# Altium PCB Main ESP32_IoT Gateaway.PcbDoc (part 1 of 4)
Units mm, origin at the board's own origin, x right, y up, seen from the top; angles counter-clockwise.
Board outline 125.73 x 73.66 mm, 4 copper layers (Top Layer, GND, Layer 2, Bottom Layer), stack 0.603 mm thick; 167 components, 121 nets, 681 pads, 324 vias.
Unrouted connection lines stored in the file: 132.
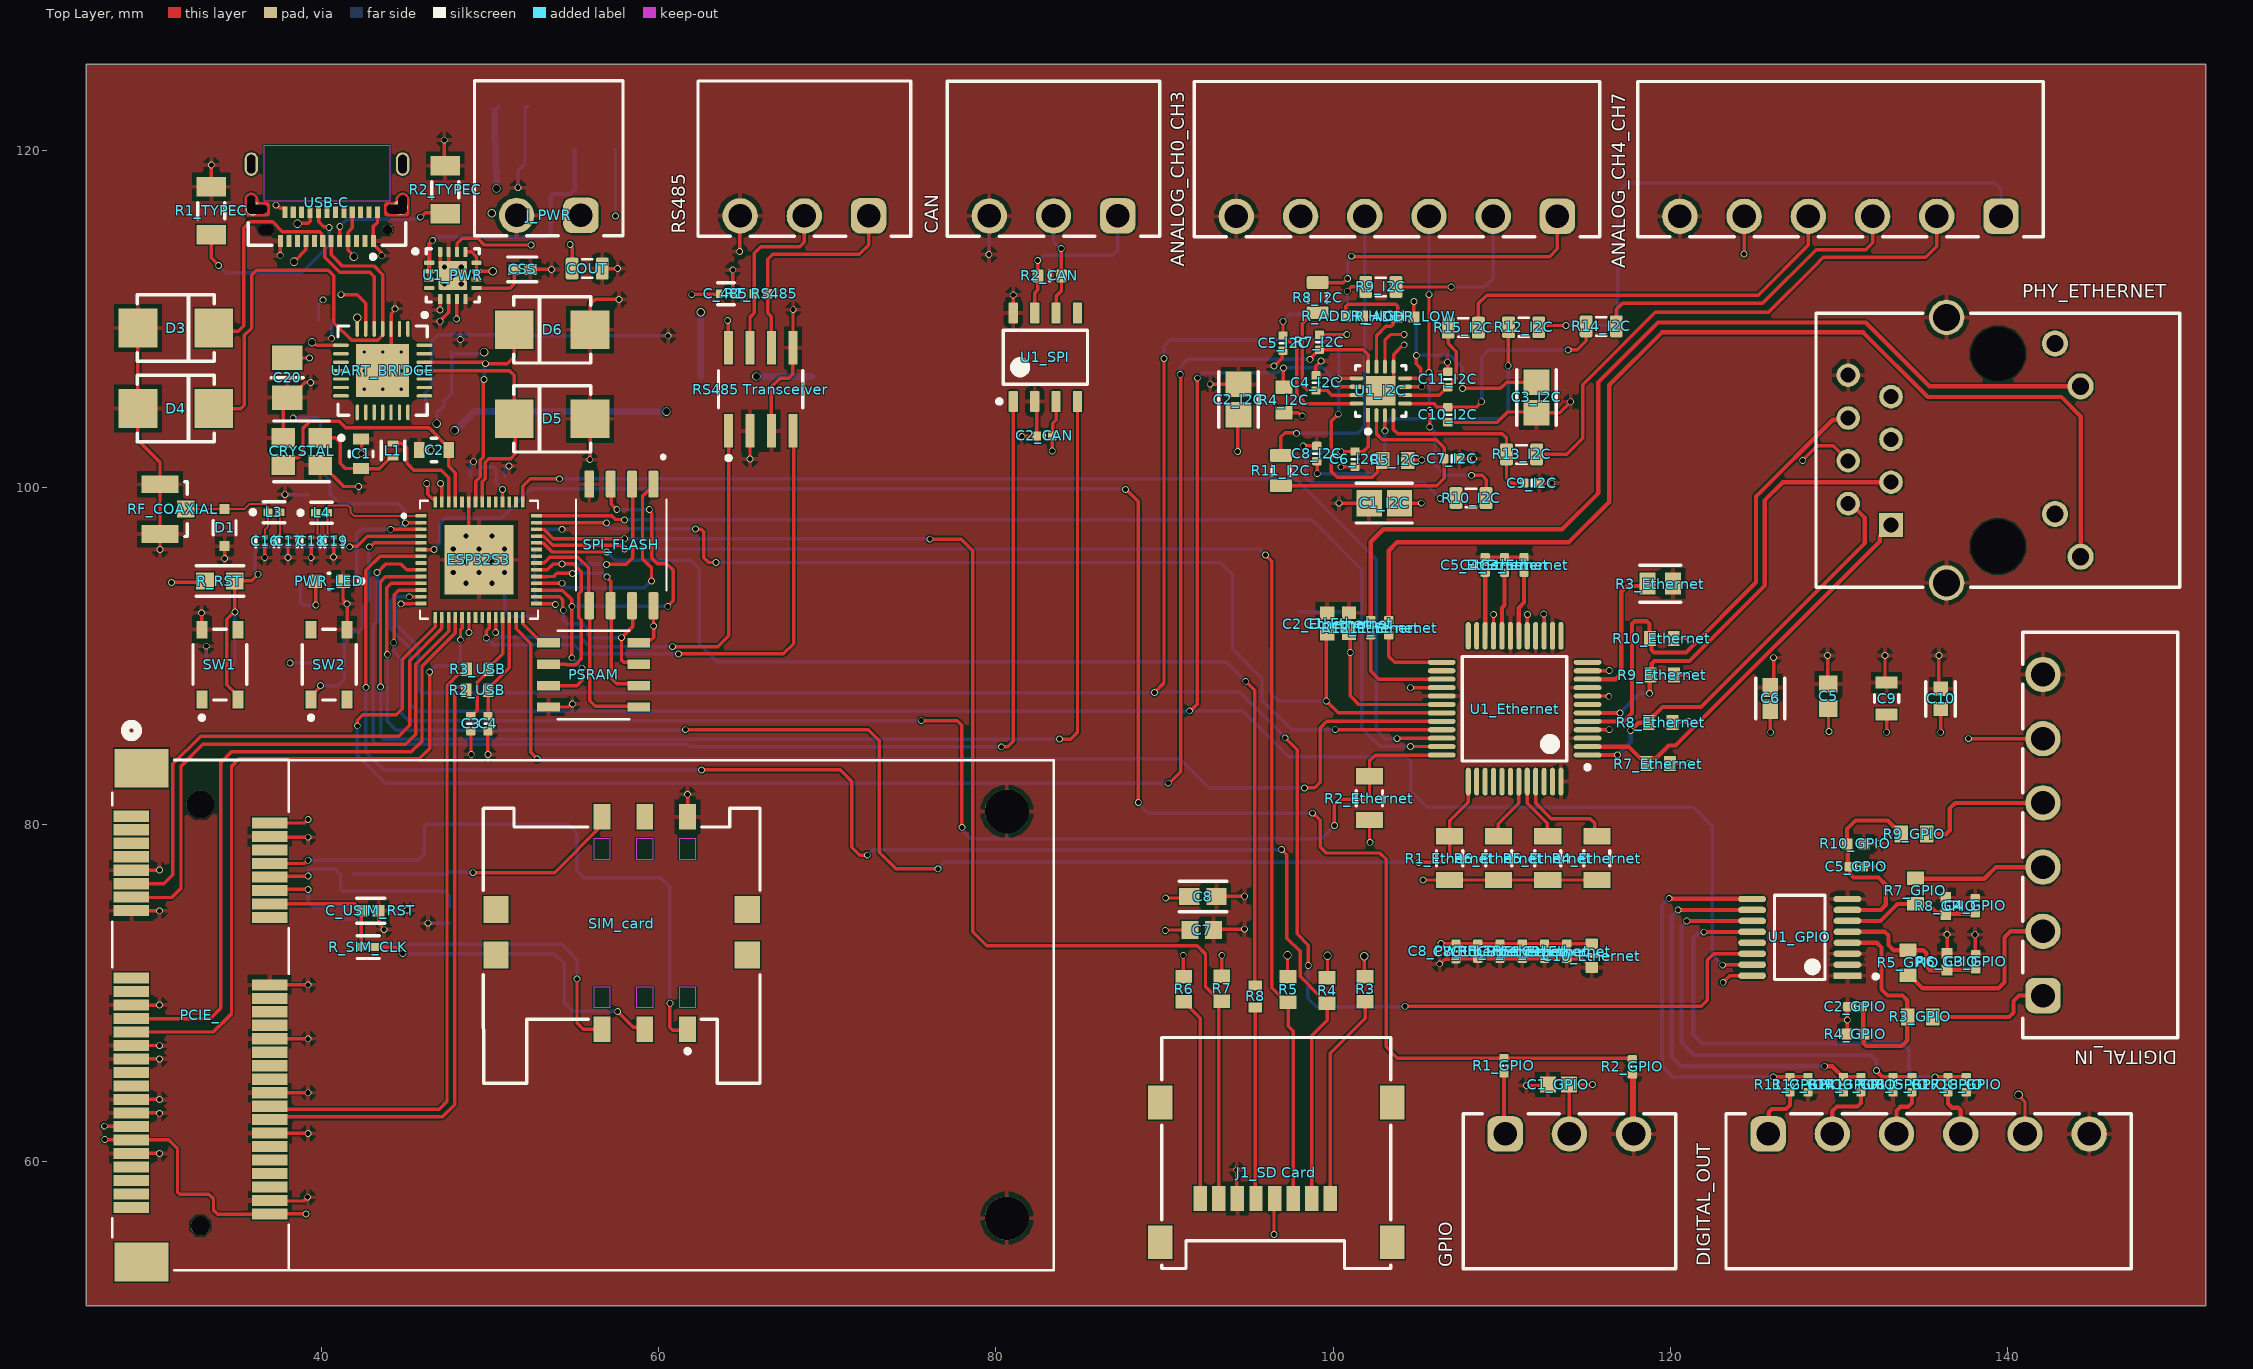
[diagram p0: Top Layer view]
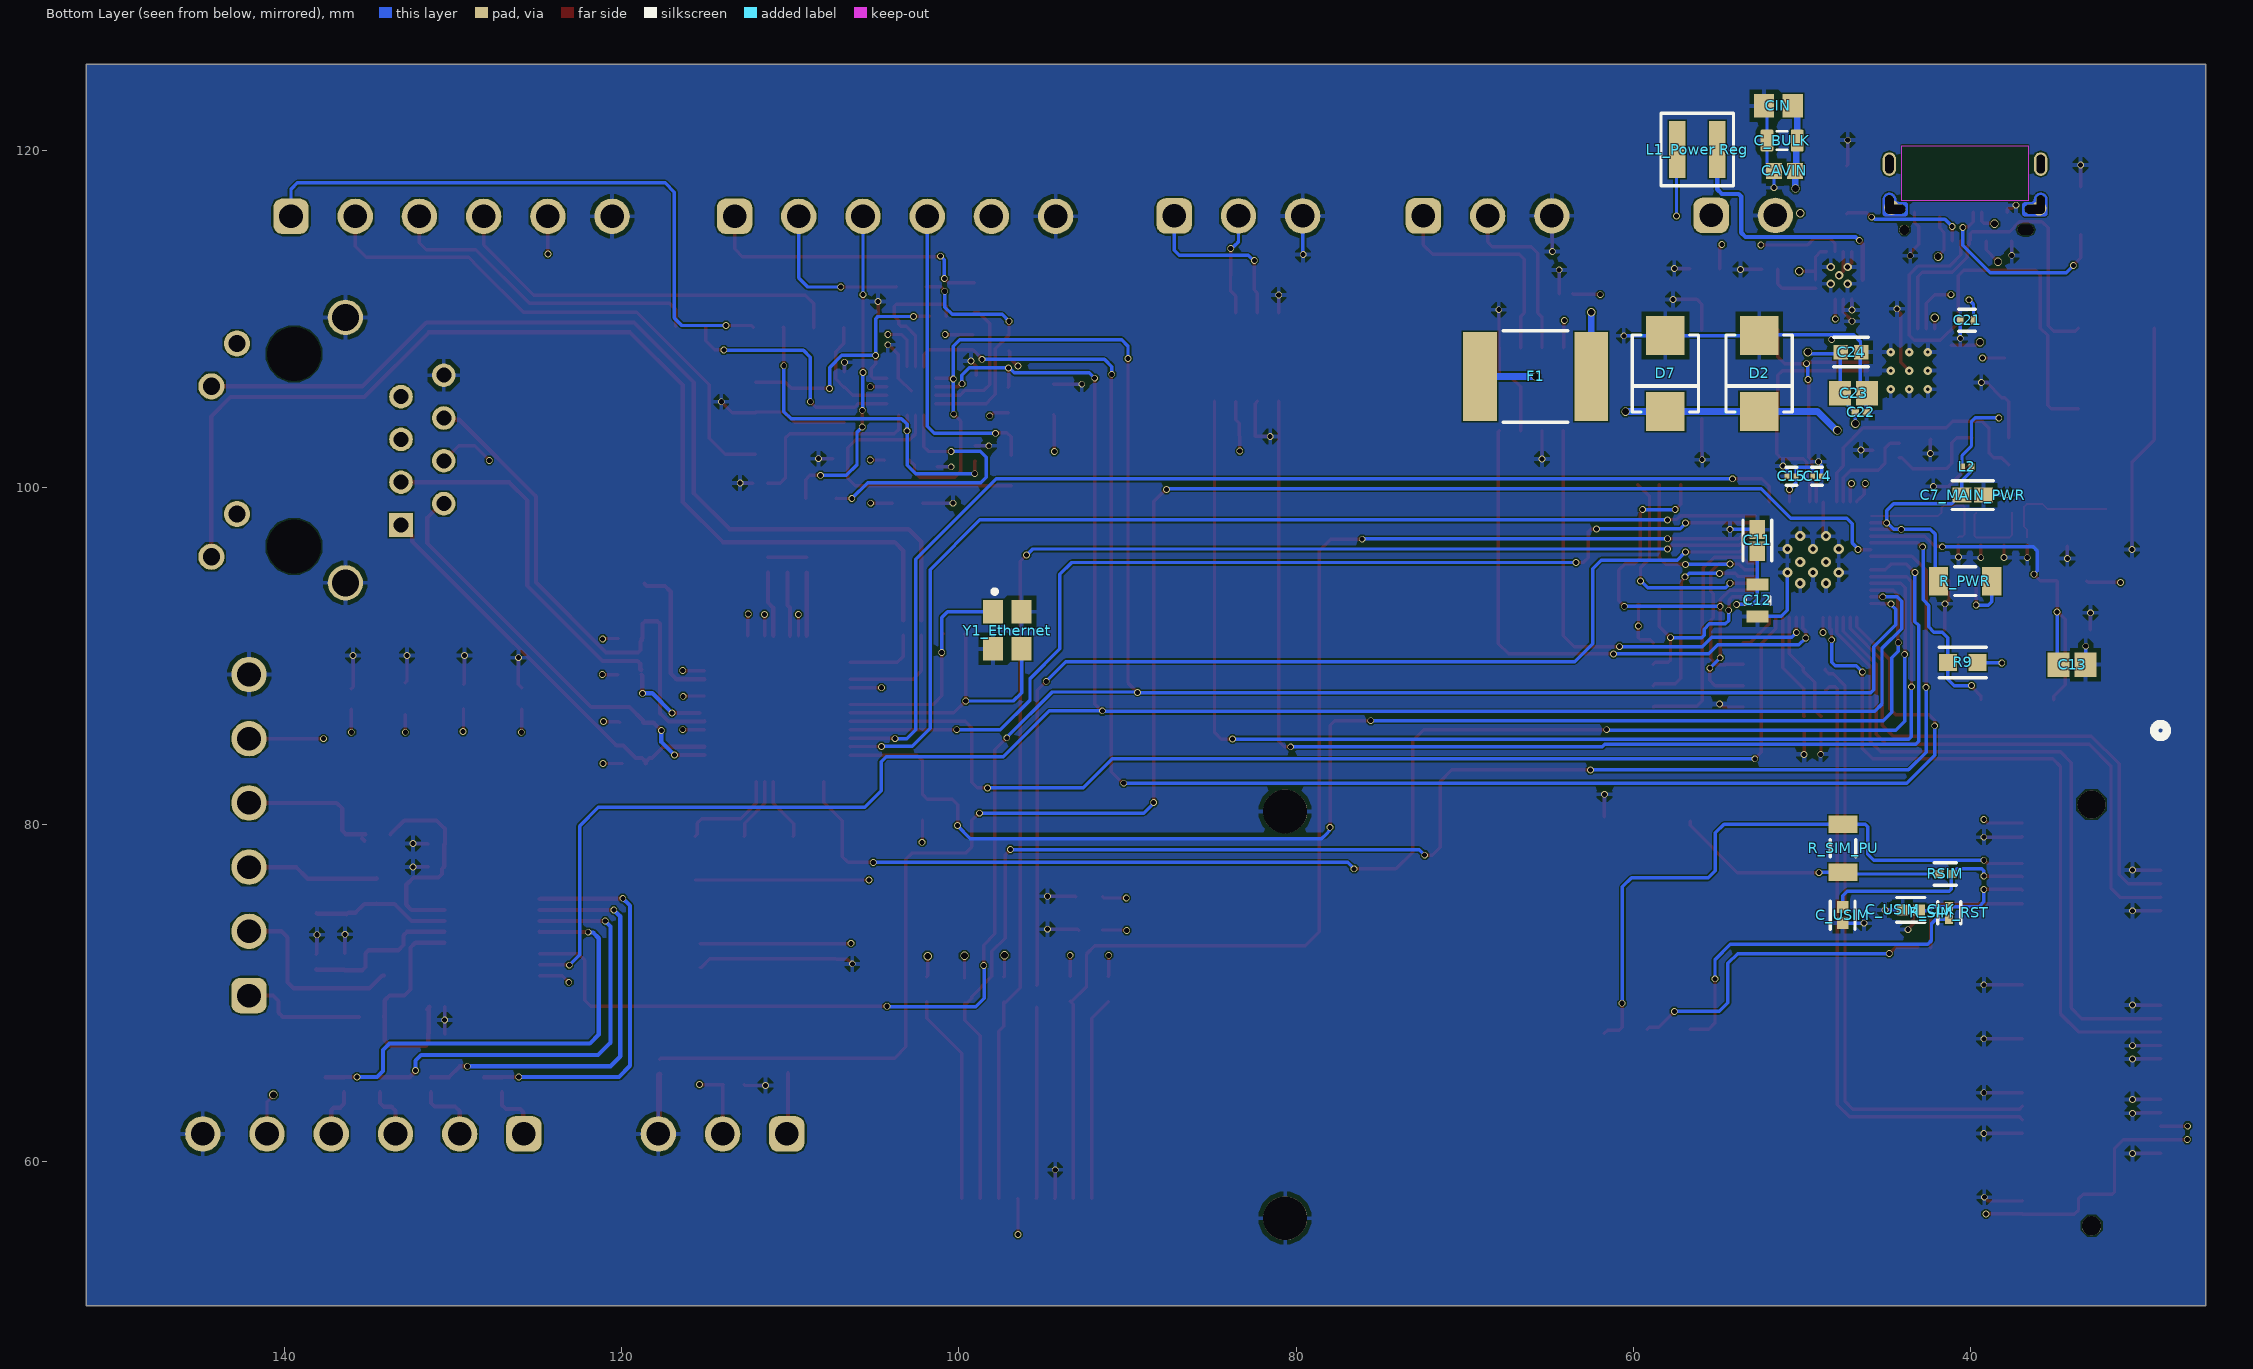
[diagram p1: Bottom Layer view, seen from below]
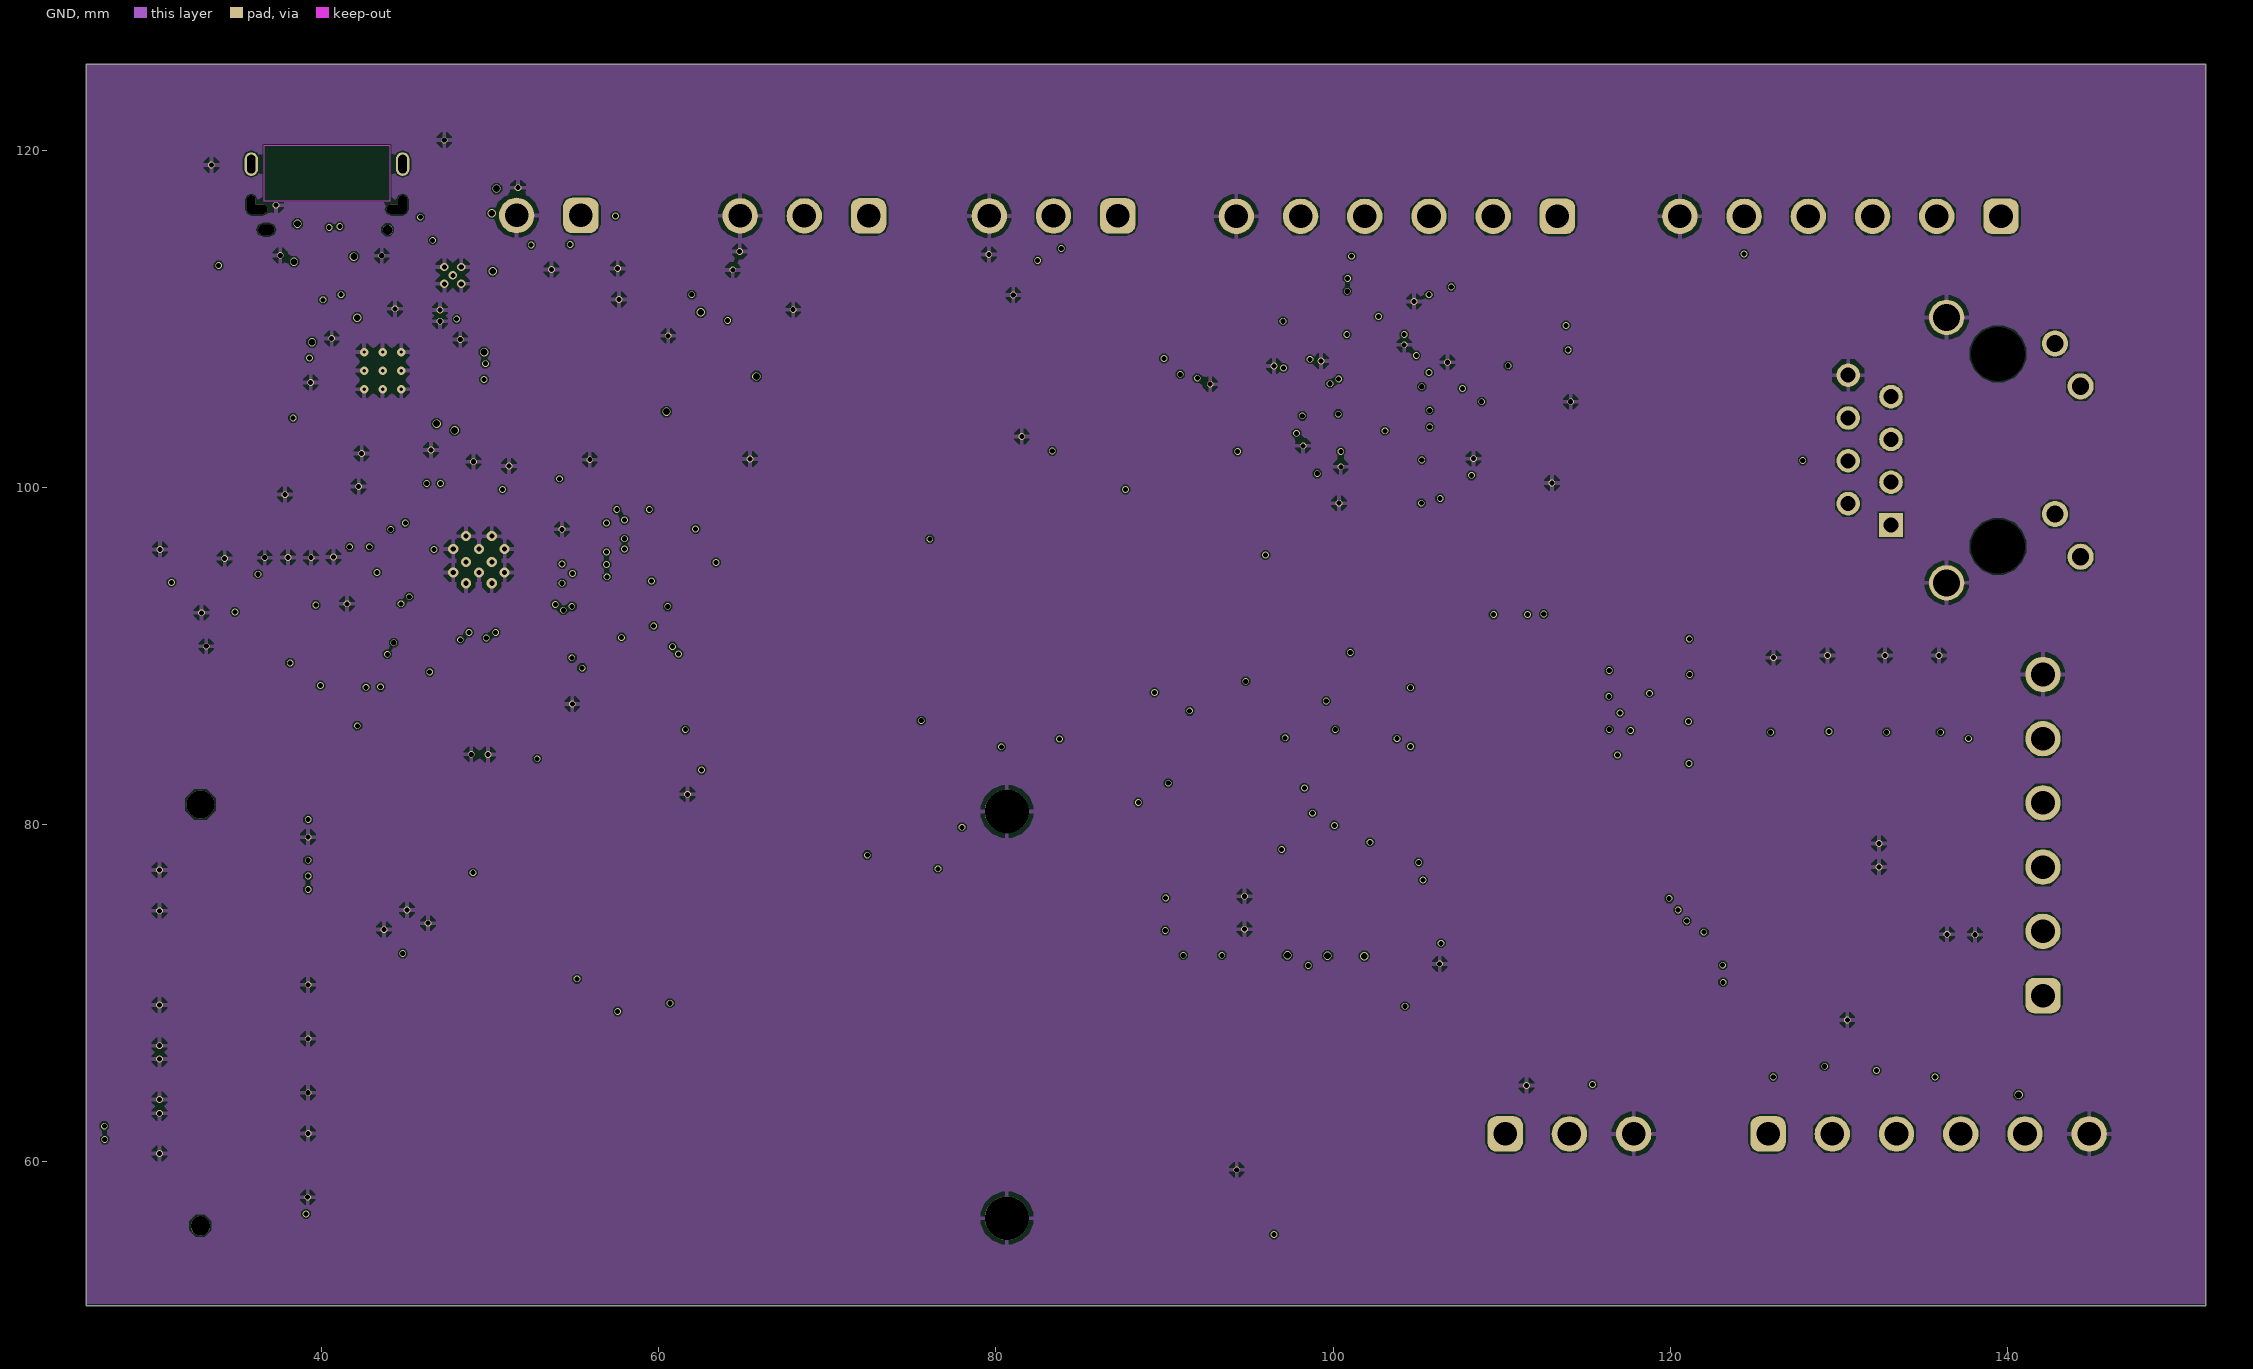
[diagram p2: GND]
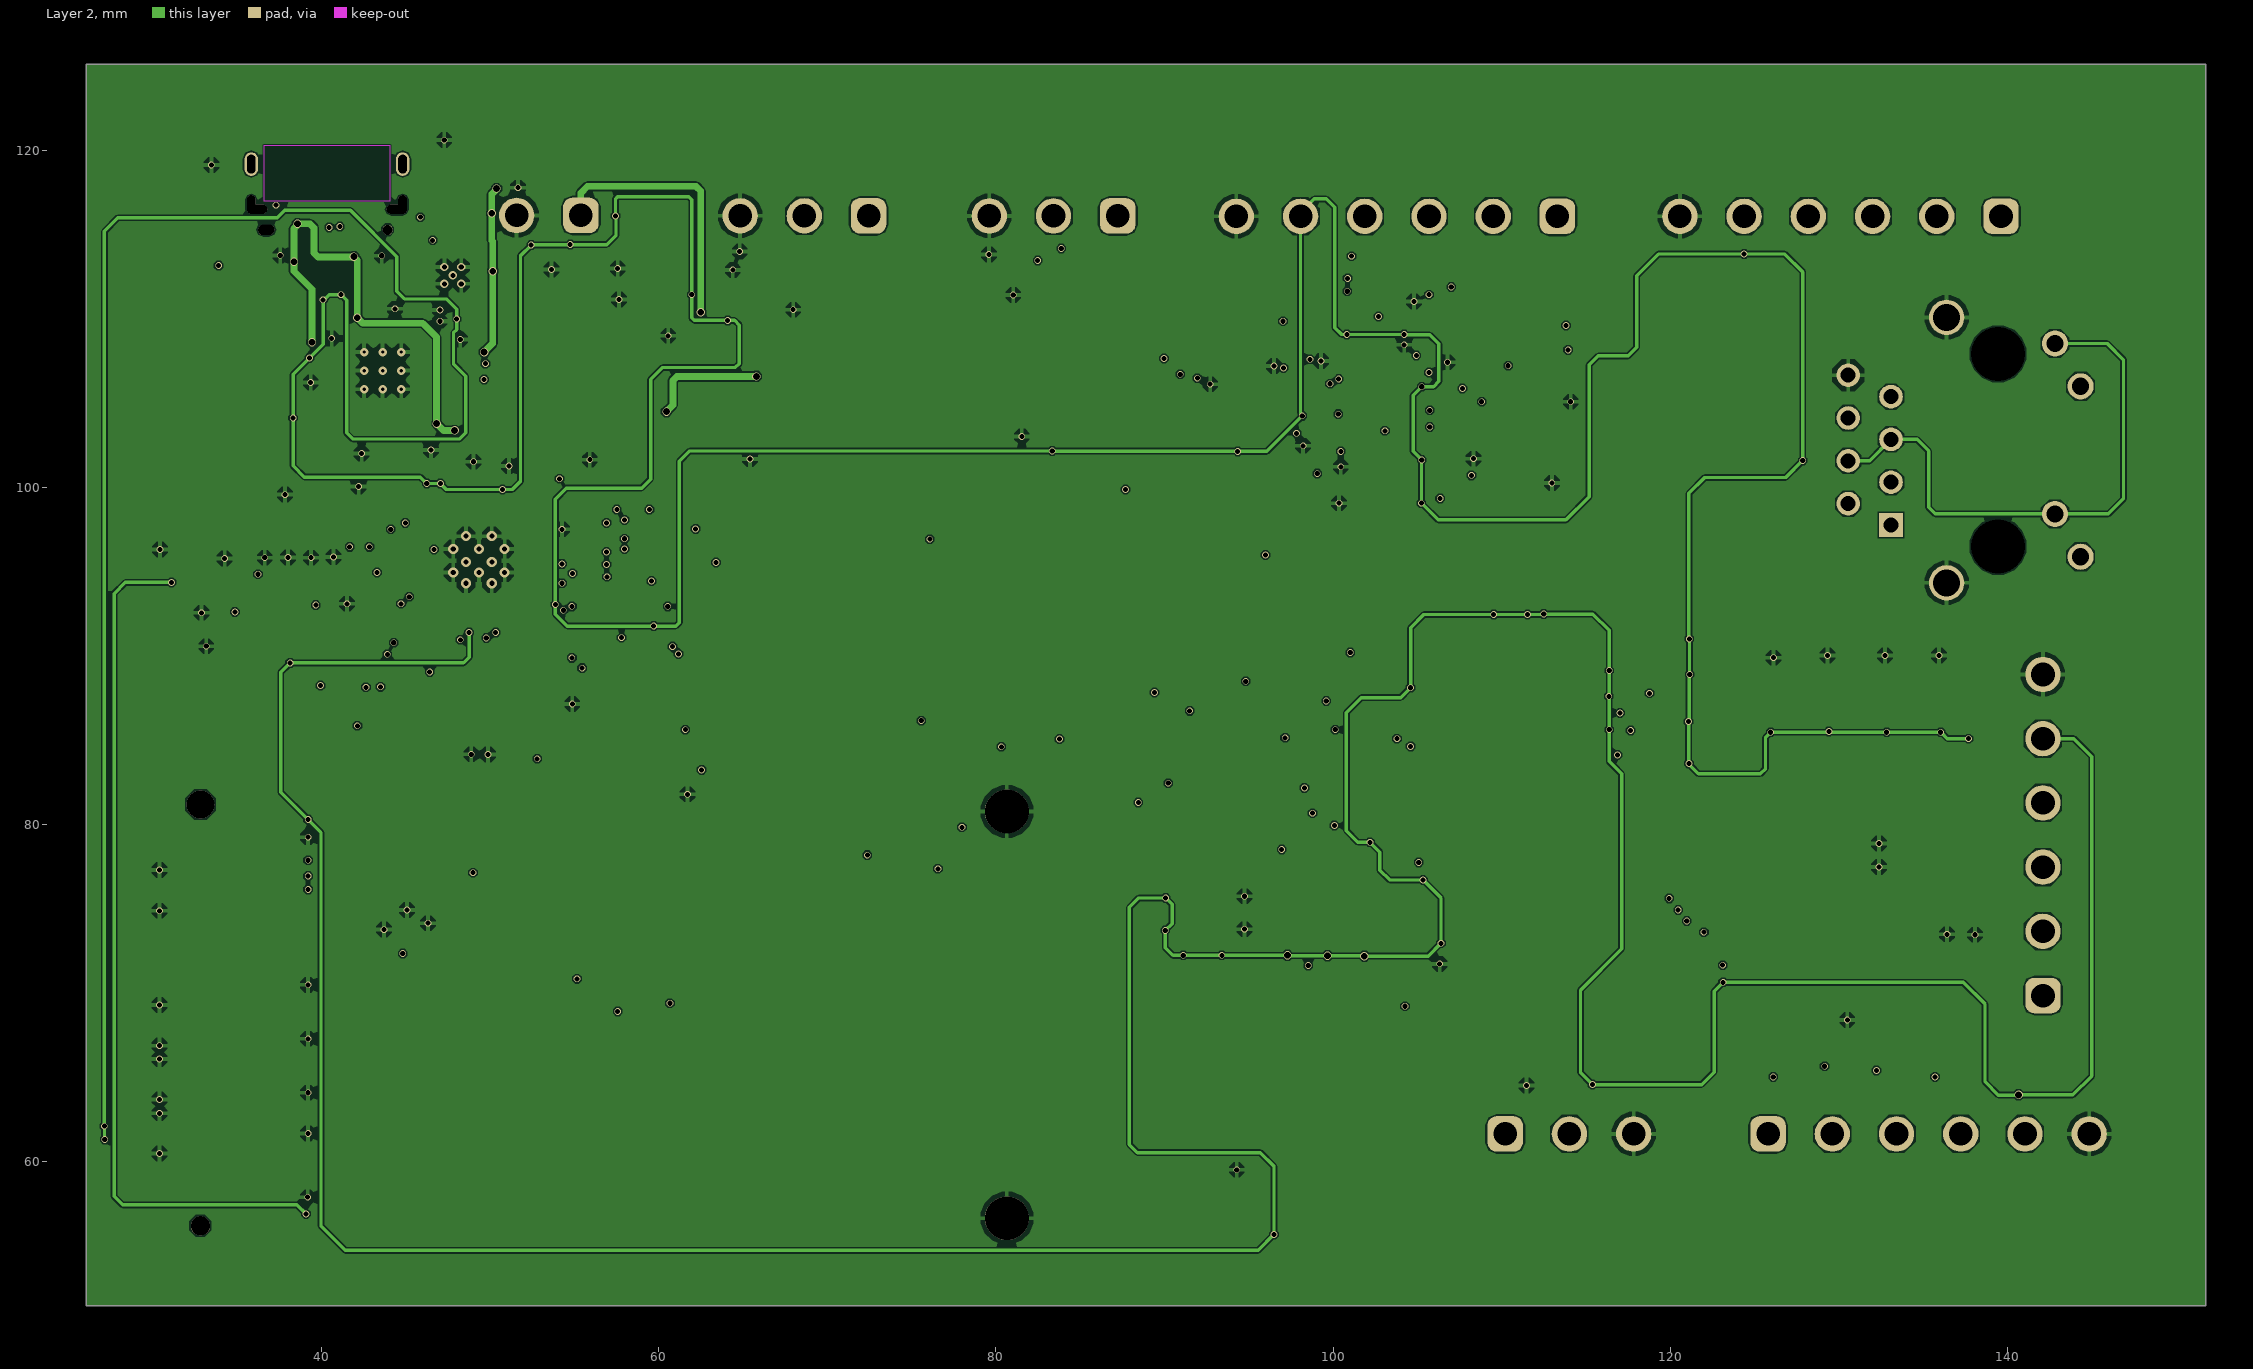
[diagram p3: Layer 2]
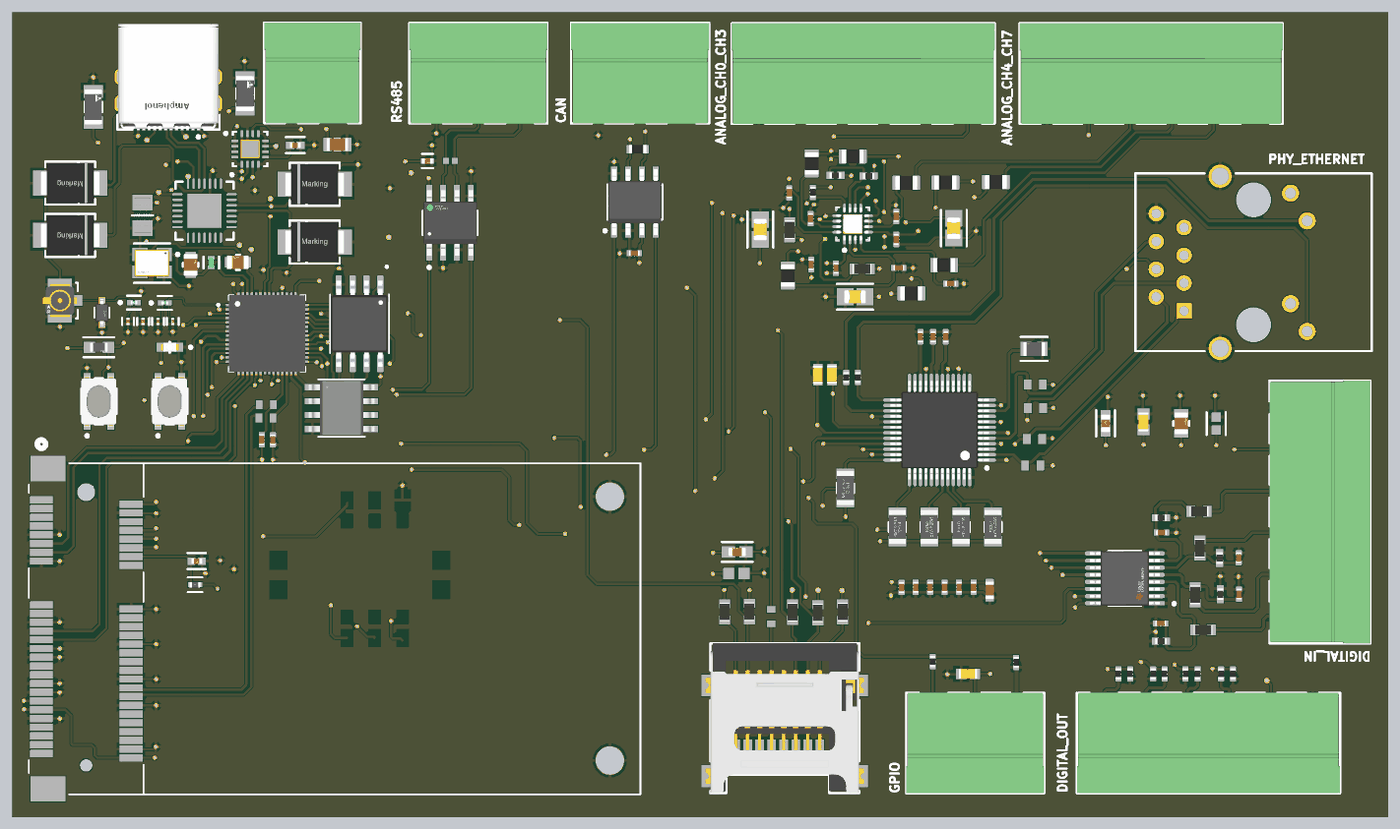
[diagram p6: 3D render of the assembled board from above, using the file's embedded part models]
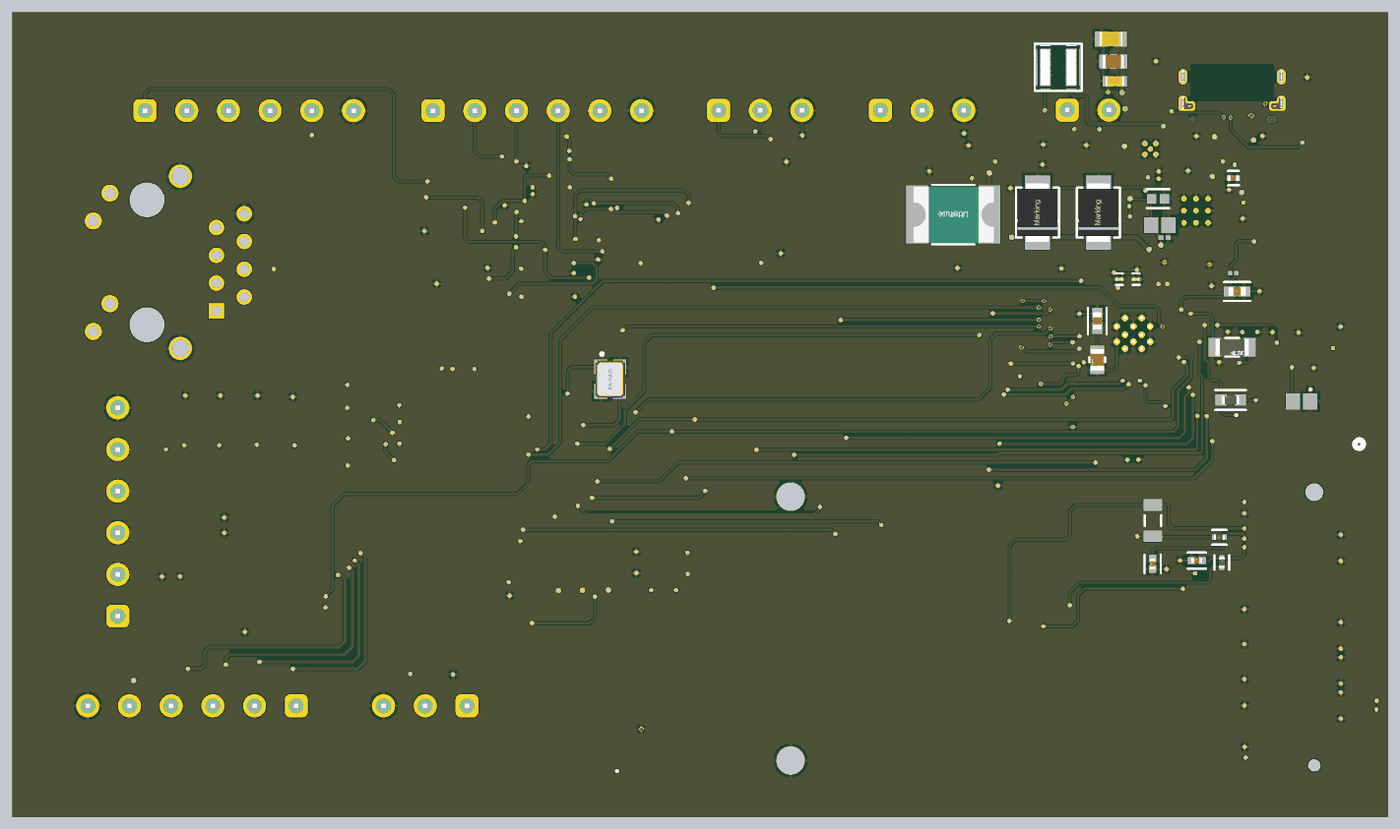
[diagram p7: 3D render of the assembled board from below, using the file's embedded part models]

## Layer stack, top to bottom
Top Solder: solder mask 0.0102, Solder Resist, Dk 3.5
Top Layer: signal copper 0.0356
Dielectric 2: prepreg 0.0711, PP-006, Dk 4.1
GND: signal copper 0.035
Dielectric 1: dielectric 0.32, FR-4, Dk 4.8
Layer 2: signal copper 0.035
Dielectric 3: prepreg 0.0711, PP-006, Dk 4.1
Bottom Layer: signal copper 0.0356
Bottom Solder: solder mask 0.0102, Solder Resist, Dk 3.5

## Board outline
26.035,51.435 26.035,125.095 151.765,125.095 151.765,51.435

## Design rules (kind name [scope] priority, off if disabled: settings)
Clearance [All] p1: gap=0.076 ignorepadtopadclearanceinfootprint=TRUE except(0: THPad-Hole; 0.051: SMDPad-SMDPad SMDPad-THPad THPad-THPad; 0.1: Arc-Arc Arc-Track Arc-SMDPad Arc-THPad Arc-Via Track-Track Track-SMDPad Track-THPad Track-Via SMDPad-Via THPad-Via Via-Via)
DiffPairsRouting DiffPairsRouting_1 [InDifferentialPair('TX')] p1: maxlimit=0.254 minlimit=0.254 mostfreqgap=0.254 toplayer_minwidth=0.254 toplayer_maxwidth=0.381 toplayer_prefwidth=0.254 midlayer1_minwidth=0.254 midlayer1_maxwidth=0.381 midlayer1_prefwidth=0.254 midlayer2_minwidth=0.254 midlayer2_maxwidth=0.381 midlayer2_prefwidth=0.254 bottomlayer_minwidth=0.254 bottomlayer_maxwidth=0.381 bottomlayer_prefwidth=0.254 maxuncoupledlength=12.7
DiffPairsRouting [InDifferentialPair('RX')] p2: maxlimit=0.254 minlimit=0.254 mostfreqgap=0.254 toplayer_minwidth=0.254 toplayer_maxwidth=0.381 toplayer_prefwidth=0.254 midlayer1_minwidth=0.254 midlayer1_maxwidth=0.381 midlayer1_prefwidth=0.254 midlayer2_minwidth=0.254 midlayer2_maxwidth=0.381 midlayer2_prefwidth=0.254 bottomlayer_minwidth=0.254 bottomlayer_maxwidth=0.381 bottomlayer_prefwidth=0.254 maxuncoupledlength=12.7
HoleSize [All] p1: absolutevalues=TRUE maxlimit=3.5 minlimit=0.025 maxpercent=80.000 minpercent=20.000
HoleToHoleClearance [All] p1: gap=0 allowstackedmicrovias=TRUE
MinimumSolderMaskSliver [All] p1: minsoldermaskwidth=0.01
PolygonConnect [All] p1: connectstyle=Relief reliefconductorwidth=0.254 reliefentries=4 polygonreliefangle="90 Angle" airgapwidth=0.254
RoutingVias [All] p1: holewidth=0.3 width=0.3 viastyle="Through Hole" minholewidth=0.2 minwidth=0.3 maxholewidth=0.4 maxwidth=0.4
SilkToSolderMaskClearance [IsPad] p1: minsilkscreentomaskgap=0.01 clearancetoexposedcopper=TRUE
SolderMaskExpansion [All] p1: expansion=0 istentingtop=FALSE
SupplyNets "Schematic Supply Nets_1" [InNet('GND')] p1: voltage=0.000
SupplyNets "Schematic Supply Nets_5" [InNet('3V3')] p2: voltage=0.000
SupplyNets "Schematic Supply Nets" [InNet('5V')] p3: voltage=0.000
Width RF [InNetClass('RF')] p1: maxlimit=0.116 minlimit=0.068 preferedwidth=0.116 toplayer_minwidth=0.116 midlayer1_maxwidth=0.068 midlayer1_prefwidth=0.068 midlayer2_maxwidth=0.068 midlayer2_prefwidth=0.068 bottomlayer_minwidth=0.116 impedanceprofiledriven=TRUE impedanceprofileid={CE16CFBE-E434-417E-8F0C-90AE14FFE117} impedanceprofilevalue=50.000000 minimp=50.000000 maximp=50.000000 favimp=50.000000
Width SIGNAL [InNetClass('SIGNAL')] p2: maxlimit=0.3 minlimit=0.2 preferedwidth=0.254
Width PWR [InNetClass('POWER')] p3: maxlimit=0.4 minlimit=0.2 preferedwidth=0.35 minimp=50.000000 maximp=50.000000 favimp=50.000000
25 further rules are at their usual default settings.

## Classes and differential pairs
net class RF: NetC16_1 NetC17_1 RF_LNA
component class "U_GPIO Direct": C1_GPIO C2_GPIO C3_GPIO C4_GPIO C5_GPIO DIGITAL_IN DIGITAL_OUT GPIO R1_GPIO R2_GPIO R3_GPIO R4_GPIO R5_GPIO R6_GPIO R7_GPIO R8_GPIO R9_GPIO R10_GPIO R11_GPIO R12_GPIO R13_GPIO R14_GPIO R15_GPIO R16_GPIO R17_GPIO R18_GPIO U1_GPIO
component class "U_Power Regulator": C_BULK CAVIN CIN COUT CSS F1 J_PWR "L1_Power Reg" U1_PWR
component class "U_Ethernet PHY": C1_Ethernet C2_Ethernet C3_Ethernet C4_Ethernet C5_Ethernet C6_Ethernet C7_Ethernet C8_Ethernet C9_Ethernet C10_Ethernet C11_Ethernet PHY_ETHERNET R1_Ethernet R2_Ethernet R3_Ethernet R4_Ethernet R5_Ethernet R6_Ethernet R7_Ethernet R8_Ethernet R9_Ethernet R10_Ethernet R11_Ethernet R12_Ethernet U1_Ethernet Y1_Ethernet
net class POWER: 3V3 5V GND NetC1_1 NetPWR_LED_2 NetR1_TYPEC_1 NetR2_TYPEC_1
net class SIGNAL: ADS_ALERT BOOT CD/DATA3 I2C_SCL I2C_SDA NetESP32S3_6 NetESP32S3_9 NetESP32S3_10 NetESP32S3_11 NetESP32S3_12 NetESP32S3_16 NetESP32S3_17 NetESP32S3_18 NetESP32S3_19 NetESP32S3_23 NetESP32S3_24 NetESP32S3_27 NetESP32S3_38 NetESP32S3_39 NetESP32S3_40 NetESP32S3_41 NetESP32S3_42 NetESP32S3_43 RXD0 SPICLK SPICS0 SPICS1 SPID SPIHD SPIQ SPIWP TXD0 XTAL_N XTAL_P
component class U_Minimum_system: C1 C2 C3 C4 C5 C6 C7_MAIN_PWR C8_PWRFLTR C9 C10 C11 C12 C13 C14 C15 C16 C17 C18 C19 C20 C21 C22 C23 C24 CRYSTAL D1 D2 D3 D4 D5 D6 D7 ESP32S3 L1 L2 L3 L4 PSRAM PWR_LED R1_TYPEC R2_TYPEC R2_USB R3_USB R9 R_PWR R_RST RF_COAXIAL SPI_FLASH SW1 SW2 UART_BRIDGE USB-C
component class "U_UART Bus": C_485 C_USIM C_USIM_CLK C_USIM_RST PCIE_ R1_RS485 R_SIM_CLK R_SIM_PU R_SIM_RST RS485 "RS485 Transceiver" RSIM SIM_card
component class "U_SPI Bus": C2_CAN CAN R2_CAN U1_SPI
component class "U_SD Card": C7 C8 "J1_SD Card" R3 R4 R5 R6 R7 R8
component class "U_I2C Bus": ANALOG_CH0_CH3 ANALOG_CH4_CH7 C1_I2C C2_I2C C3_I2C C4_I2C C5_I2C C6_I2C C7_I2C C8_I2C C9_I2C C10_I2C C11_I2C R4_I2C R5_I2C R7_I2C R8_I2C R9_I2C R10_I2C R11_I2C R12_I2C R13_I2C R14_I2C R15_I2C R_ADDR_HIGH R_ADDR_LOW U1_I2C
differential pair RX: +RX_P -RX_N
differential pair TX: +TX_P -TX_N
differential pair D: +D_P -D_N
differential pair USB: +USB_P -USB_N
differential pair DATA: +DATA_P -DATA_N

## Components (designator, comment, footprint, x,y, rotation, side; value= is the part's Value field where it differs from the comment)
ANALOG_CH0_CH3 "691322310006" 691322310006 103.784,119.478 r180 top (schematic designator J1_I2C)
ANALOG_CH4_CH7 "691322310006" 691322310006 130.099,119.478 r180 top (schematic designator J2_I2C)
C1 "28 pF" FP-GQM219-0_15-MFG 42.342,101.981 r90 top
C1_Ethernet "18 pF" CAPC1608X90X35LL10T15 100.94,91.938 r90 top
C1_GPIO "Capacitor 100 nF +/-10% 50 V 0603" CAPC1608X90X40NL10T20 113.36,64.567 r180 top value=100nF
C1_I2C "AC0805KKX7R5BB105" FP-AC0805-0_85-IPC_A 103.036,99.06 r180 top value=1µF
C2 "28 pF" FP-GQM219-0_15-MFG 46.66,102.21 r180 top
C2_CAN "Capacitor 100nF +/-20% 50V 0402" CAPC0402(1005)60_L 82.88,103.048 r0 top value=100nF
C2_Ethernet "18 pF" CAPC1608X90X35LL10T15 99.644,91.923 r270 top
C2_GPIO "Capacitor 10nF +/-20% 50V 0402" CAPC0402(1005)60_L 130.962,69.19 r180 top value=10nF
C2_I2C "AC0805KKX7R5BB105" FP-AC0805-0_85-IPC_A 94.386,105.207 r90 top value=1µF
C3 "Capacitor 100nF +/-20% 50V 0402" CAPC0402(1005)60_L 48.844,85.983 r270 top value=100nF
C3_Ethernet "Capacitor 100nF +/-20% 10V 0402" CAPC0402(1005)60_L 111.328,95.395 r90 top value=100nF
C3_GPIO "Capacitor 10nF +/-20% 50V 0402" CAPC0402(1005)60_L 138.125,71.857 r90 top value=10nF
C3_I2C "AC0805KKX7R5BB105" FP-AC0805-0_85-IPC_A 112.065,105.334 r270 top value=1µF
C4 "Capacitor 100nF +/-20% 50V 0402" CAPC0402(1005)60_L 49.86,85.972 r90 top value=100nF
C4_Ethernet "Capacitor 100nF +/-20% 10V 0402" CAPC0402(1005)60_L 110.174,95.395 r90 top value=100nF
C4_GPIO "Capacitor 10nF +/-20% 50V 0402" CAPC0402(1005)60_L 138.1,75.184 r90 top value=10nF
C4_I2C "Capacitor 10nF +/-20% 50V 0402" CAPC0402(1005)60_L 98.984,106.197 r90 top value=10nF
C5 "Capacitor 1uF +/- 10% 16V 0603" CAPC1608X90X35ML15T15 129.388,87.605 r270 top value=1µF
C5_Ethernet "Capacitor 100nF +/-20% 10V 0402" CAPC0402(1005)60_L 109.02,95.395 r270 top value=100nF
C5_GPIO "Capacitor 10nF +/-20% 50V 0402" CAPC0402(1005)60_L 131.039,77.495 r0 top value=10nF
C5_I2C "Capacitor 10nF +/-20% 50V 0402" CAPC0402(1005)60_L 97.028,108.56 r270 top value=10nF
C6 "0.1 uF" FP-C1608-080-0_1-IPC_B 125.933,87.478 r270 top
C6_Ethernet "Capacitor 100nF +/-20% 10V 0402" CAPC0402(1005)60_L 112.547,72.484 r90 top value=100nF
C6_I2C "Capacitor 10nF +/-20% 50V 0402" CAPC0402(1005)60_L 101.295,101.676 r270 top value=10nF
C7 "100 nF" MURA-0603_H_0.9_M 92.202,73.736 r0 top
C7_Ethernet "Capacitor 100nF +/-20% 10V 0402" CAPC0402(1005)60_L 111.227,72.484 r90 top value=100nF
C7_I2C "Capacitor 10nF +/-20% 50V 0402" CAPC0402(1005)60_L 107.036,101.702 r0 top value=10nF
C7_MAIN_PWR "0.1 uF" FP-C1608-080-0_1-IPC_B 39.853,99.543 r0 bottom
C8 "10 uF" FP-GRM188-0_1-e0_2_0_55-IPC_A 92.278,75.717 r180 top
C8_Ethernet "Capacitor 100nF +/-20% 10V 0402" CAPC0402(1005)60_L 108.586,72.484 r90 top value=100nF
C8_I2C "Capacitor 10nF +/-20% 50V 0402" CAPC0402(1005)60_L 99.035,102.006 r90 top value=10nF
C8_PWRFLTR "Capacitor 10nF +/-20% 50V 0402" CAPC0402(1005)60_L 107.29,72.466 r90 top value=10nF
C9 "1 uF" FP-GRM21B-0_2-e0_2_0_7-MFG 132.842,87.467 r90 top
C9_Ethernet "Capacitor 100nF +/-20% 10V 0402" CAPC0402(1005)60_L 113.867,72.484 r90 top value=100nF
C9_I2C "Capacitor 10nF +/-20% 50V 0402" CAPC0402(1005)60_L 111.785,100.254 r0 top value=10nF
C10 "10 uF" FP-GRM188-0_15-IPC_C 136.042,87.452 r90 top
C10_Ethernet "Capacitor 10µF +/-20% 10V 0603" CAPC0603(1608)100_L 115.341,72.216 r90 top value=10µF
C10_I2C "Capacitor 10nF +/-20% 50V 0402" CAPC0402(1005)60_L 106.807,104.3 r270 top value=10nF
C11 "0.1 uF" FP-C1608-080-0_1-IPC_B 52.629,96.85 r90 bottom
C11_Ethernet "Capacitor 100nF +/-20% 10V 0402" CAPC0402(1005)60_L 109.906,72.484 r90 top value=100nF
C11_I2C "Capacitor 10nF +/-20% 50V 0402" CAPC0402(1005)60_L 106.807,106.401 r90 top value=10nF
C12 "1 uF" FP-GRM21B-0_2-e0_2_0_7-MFG 52.629,93.294 r270 bottom
C13 "1 uF" CAPC2013X140X50NL20T25 33.96,89.484 r180 bottom
C14 "0.1 uF" FP-CC0201-BA-MFG 49.084,100.66 r180 bottom value="100 nF"
C15 "0.1 uF" FP-CC0201-BA-MFG 50.608,100.66 r0 bottom value="100 nF"
C16 "1.5 pF" FP-GRM033-0_03-MFG 36.627,96.799 r270 top
C17 "1.5 pF" FP-GRM033-0_03-MFG 37.998,96.799 r270 top
C18 "1.5 pF" FP-GRM033-0_03-MFG 39.37,96.799 r270 top
C19 "1.5 pF" FP-GRM033-0_03-MFG 40.716,96.799 r270 top
C20 "4.7 uF" FP-GCJ31C-0_3-IPC_C 37.948,106.502 r270 top
C21 "100 nF" FP-GRM155-0_05-MFG 40.191,109.912 r0 bottom
C22 "100 nF" CAPC0603X33X15NL03T05 46.49,104.451 r0 bottom
C23 "1 uF" CAPC2013X140X50NL20T25 46.922,105.594 r180 bottom
C24 "10 uF" FP-GRM188-0_15-IPC_C 47.075,108.026 r180 bottom
C_485 "0.1 uF" FP-GRM155-0_05-MFG 63.983,111.481 r0 top
C_BULK "Capacitor 47µF +/-40% 6.3V 0805" CAPC0805(2012)145_L 51.167,120.574 r0 bottom value=47µF
C_USIM "33 pF" FP-GCM155-0_05-IPC_A 47.574,74.625 r270 bottom
C_USIM_CLK "33 pF" FP-GCM155-0_05-IPC_A 43.532,74.93 r0 bottom
C_USIM_RST "33 pF" FP-GCM155-0_05-IPC_A 42.901,74.879 r0 top
CAN "691322310003" 691322310003 83.414,119.503 r180 top (schematic designator P1_SPI)
CAVIN "Capacitor 100 nF +/-10% 50 V 0603" CAPC1608X90X40NL10T20 51.019,118.77 r0 bottom value=100nF
CIN "Capacitor 10 uF +/- 10% 16 V 0805" CAPC2013X135X45NL10T25 51.384,122.631 r0 bottom value=10µF
COUT "Capacitor 22µF +/-40% 16V 0805" CAPC0805(2012)145_L 55.753,112.979 r0 top value=22µF
CRYSTAL "40 MHz Crystal" FP-ABM8AIG-MFG 38.811,102.133 r180 top
CSS "GCG155R71H332KA01D" FP-GCG155-0_1-IPC_A 51.899,112.928 r0 top value=3.3nF
D1 "SOD323" FP-SOD323-CA-MFG 34.239,97.612 r270 top
D2 "824520581" WE-TVSP_DO-214AA_Unidirectional 52.523,106.756 r90 bottom
D3 "824520581" WE-TVSP_DO-214AA_Unidirectional 31.344,109.449 r180 top
D4 "824520581" WE-TVSP_DO-214AA_Unidirectional 31.344,104.673 r180 top
D5 "824520581" WE-TVSP_DO-214AA_Unidirectional 53.67,104.064 r0 top
D6 "824520581" WE-TVSP_DO-214AA_Unidirectional 53.67,109.347 r0 top
D7 "824520581" WE-TVSP_DO-214AA_Unidirectional 58.09,106.756 r90 bottom
DIGITAL_IN "691322310006" 691322310006 145.513,79.375 r90 top (schematic designator J2_GPIO)
DIGITAL_OUT "691322310006" 691322310006 135.331,58.242 r0 top (schematic designator J3_GPIO)
ESP32S3 "ESP32-S3" IC_ESP32-S3 49.327,95.707 r0 top
F1 "2920L300/15DR" FP-2920L-MFG 65.786,106.578 r0 bottom value=15mΩ
GPIO "691322310003" 691322310003 114.021,58.242 r0 top (schematic designator J1_GPIO)
"J1_SD Card" "693072010801" 693072010801 96.626,60.51 r0 top
J_PWR "691322310002" 691322310002 53.467,119.532 r180 top
L1 "24 nH" FP-LQW15AN_00-W0_5-0_1-MFG 44.221,102.184 r90 top
"L1_Power Reg" "XFL4020-222MEB" FP-XFL4020-MFG 56.194,120.04 r0 bottom value=2.2µH
L2 "ATFC-0201HQ-2N0B-T" INDC0603X28N 40.208,101.219 r180 bottom value=2nH
L3 "LQP03TN2N7B02D" FP-LQP03TG_02-IPC_A 37.164,98.524 r0 top
L4 "LQP03TN2N7B02D" FP-LQP03TG_02-IPC_A 39.989,98.491 r0 top
PCIE_ "679105700" CONN_679105700_MOL 32.801,68.686 r270 top
PHY_ETHERNET "J0011D21BNL" PULS-J00XXD21XNL-B-12 139.448,102.209 r270 top (schematic designator J1_Ethernet)
PSRAM "APS1604M-3SQR-SN" SOP8L_APS1604M-3SQR-SN_APY 56.134,88.875 r0 top
PWR_LED "APTD1608ZGC" FP-APTD1608ZGC-MFG 40.437,94.437 r180 top
R1_Ethernet "CRGCQ1206F10K" FP-CRGCQ1206-IPC_C 106.909,78.003 r270 top value=10k
R1_GPIO "Resistor 330R +/-5 % 0402 63 mW" RESC0402(1005)_L 110.134,65.684 r270 top value=330
R1_RS485 "120R 5% 0201(0603)" RESC0201(0603)_M 66.065,111.481 r180 top value="120.00 Ohm"
R1_TYPEC "5K1 ohm" FP-CRCW1206-e3-IPC_B 33.452,116.408 r90 top
R2_CAN "Resistor 120R +/-5 % 0603 0.1 W" RESC0603(1608)_L 83.185,112.547 r180 top value=120
R2_Ethernet "CRGCQ1206F10K" FP-CRGCQ1206-IPC_C 102.159,81.559 r270 top value=10k
R2_GPIO "Resistor 10K  +/-1 % 0402 63 mW" RESC0402(1005)_L 117.754,65.615 r270 top value=10k
R2_TYPEC "5K1 ohm" FP-CRCW1206-e3-IPC_B 47.32,117.653 r90 top
R2_USB "22 ohm" RESC1608X55X25LL10T15 49.225,87.96 r0 top
R3 "Resistor 10k +/-1% 0603 100 mW" RESC1608X55X25ML10T15 101.898,70.22 r270 top value=10k
R3_Ethernet "12.4kΩ" FP-TFCR0805-IPC_C 119.405,94.285 r0 top
R3_GPIO "Resistor 1k +/-1% 0603 100 mW" RESC1608X55X25ML10T15 134.837,68.58 r180 top value=1k
R3_USB "22 ohm" RESC1608X55X25LL10T15 49.251,89.205 r0 top
R4 "Resistor 10k +/-1% 0603 100 mW" RESC1608X55X25ML10T15 99.644,70.143 r90 top value=10k
R4_Ethernet "CRGCQ1206F10K" FP-CRGCQ1206-IPC_C 115.646,78.003 r90 top value=10k
R4_GPIO "Resistor 10k +/-1% 0402 63 mW" RESC1005X40X25ML05T05 130.988,67.564 r180 top value=10k
R4_I2C "Resistor 4k7 +/-1% 0603 100 mW" RESC1608X55X25ML10T15 97.079,105.181 r90 top value=4.7k
R5 "Resistor 10k +/-1% 0603 100 mW" RESC1608X55X25ML10T15 97.333,70.206 r90 top value=10k
R5_Ethernet "CRGCQ1206F10K" FP-CRGCQ1206-IPC_C 112.734,78.003 r90 top value=10k
R5_GPIO "Resistor 1k +/-1% 0603 100 mW" RESC1608X55X25ML10T15 134.112,71.792 r90 top value=1k
R5_I2C "Resistor 4k7 +/-1% 0603 100 mW" RESC1608X55X25ML10T15 103.683,101.6 r180 top value=4.7k
R6 "Resistor 10k +/-1% 0603 100 mW" RESC1608X55X25ML10T15 91.142,70.228 r270 top value=10k
R6_Ethernet "CRGCQ1206F10K" FP-CRGCQ1206-IPC_C 109.821,78.003 r90 top value=10k
R6_GPIO "Resistor 10k +/-1% 0402 63 mW" RESC1005X40X25ML05T05 136.423,71.857 r90 top value=10k
R7 "Resistor 10k +/-1% 0603 100 mW" RESC1608X55X25ML10T15 93.396,70.256 r270 top value=10k
R7_Ethernet "49.9 Ω" RESC1608X55X25NL10T15 119.278,83.617 r0 top
R7_GPIO "Resistor 1k +/-1% 0603 100 mW" RESC1608X55X25ML10T15 134.543,76.06 r270 top value=1k
R7_I2C "Resistor 10K  +/-1 % 0402 63 mW" RESC0402(1005)_L 99.187,108.61 r270 top value=10k
R8 "33 Ω" RESC1608X55X25LL10T15 95.377,69.799 r270 top
R8_Ethernet "49.9 Ω" RESC1608X55X25NL10T15 119.431,86.055 r180 top
R8_GPIO "Resistor 10k +/-1% 0402 63 mW" RESC1005X40X25ML05T05 136.347,75.159 r90 top value=10k
R8_I2C "Resistor 1K +/-5% 0805 125 mW" RESC0805(2012)_L 99.085,111.252 r270 top value=1k
R9 "10K" FP-AC0603-IPC_A 40.449,89.611 r0 bottom
R9_Ethernet "49.9 Ω" RESC1608X55X25NL10T15 119.532,88.875 r180 top
R9_GPIO "Resistor 1k +/-1% 0603 100 mW" RESC1608X55X25ML10T15 134.468,79.426 r180 top value=1k
R9_I2C "Resistor 1K +/-5% 0805 125 mW" RESC0805(2012)_L 102.826,111.89 r180 top value=1k
R10_Ethernet "49.9 Ω" RESC1608X55X25NL10T15 119.507,91.034 r0 top
R10_GPIO "Resistor 10k +/-1% 0402 63 mW" RESC1005X40X25ML05T05 130.988,78.842 r0 top value=10k
R10_I2C "Resistor 1K +/-5% 0805 125 mW" RESC0805(2012)_L 108.179,99.365 r180 top value=1k
R11_Ethernet "Resistor 330R +/-5 % 0402 63 mW" RESC0402(1005)_L 103.302,91.669 r270 top value=330
R11_GPIO "Resistor 330R +/-5 % 0402 63 mW" RESC0402(1005)_L 127.102,64.56 r270 top value=330
R11_I2C "Resistor 1K +/-5% 0805 125 mW" RESC0805(2012)_L 96.901,100.99 r270 top value=1k
R12_Ethernet "Resistor 330R +/-5 % 0402 63 mW" RESC0402(1005)_L 102.235,91.669 r270 top value=330
R12_GPIO "Resistor 10K  +/-1 % 0402 63 mW" RESC0402(1005)_L 128.168,64.56 r270 top value=10k
R12_I2C "Resistor 1K +/-5% 0805 125 mW" RESC0805(2012)_L 111.303,109.499 r180 top value=1k
R13_GPIO "Resistor 330R +/-5 % 0402 63 mW" RESC0402(1005)_L 131.318,64.56 r270 top value=330
R13_I2C "Resistor 1K +/-5% 0805 125 mW" RESC0805(2012)_L 111.176,101.956 r180 top value=1k
R14_GPIO "Resistor 10K  +/-1 % 0402 63 mW" RESC0402(1005)_L 130.277,64.56 r270 top value=10k
R14_I2C "Resistor 1K +/-5% 0805 125 mW" RESC0805(2012)_L 115.9,109.55 r180 top value=1k
R15_GPIO "Resistor 330R +/-5 % 0402 63 mW" RESC0402(1005)_L 134.341,64.56 r270 top value=330
R15_I2C "Resistor 1K +/-5% 0805 125 mW" RESC0805(2012)_L 107.721,109.474 r180 top value=1k
R16_GPIO "Resistor 10K  +/-1 % 0402 63 mW" RESC0402(1005)_L 133.223,64.56 r270 top value=10k
R17_GPIO "Resistor 330R +/-5 % 0402 63 mW" RESC0402(1005)_L 136.477,64.56 r270 top value=330
R18_GPIO "Resistor 10K  +/-1 % 0402 63 mW" RESC0402(1005)_L 137.566,64.56 r270 top value=10k
R_ADDR_HIGH "Resistor 0R +/- 5% 0402 100 mW" RESC1005X40X25ML05T05 101.252,110.16 r0 top value=DNP
R_ADDR_LOW "Resistor 0R +/- 5% 0402 100 mW" RESC1005X40X25ML05T05 104.292,110.109 r180 top value=DNP
R_PWR "1K" FP-RP732B-MFG 40.31,94.437 r180 bottom value=1.0KΩ
R_RST "10K" FP-AC0603-IPC_A 33.96,94.437 r0 top
R_SIM_CLK "0" FP-CRG0402-IPC_C 42.748,72.72 r0 top
R_SIM_PU "15k" RESC3116X65X40NL10T20 47.549,78.585 r90 bottom
R_SIM_RST "0" FP-CRG0402-IPC_C 41.25,74.752 r270 bottom
RF_COAXIAL "2337019-1" FP-2337019-1-MFG 30.404,98.706 r90 top
RS485 "691322310003" 691322310003 68.631,119.507 r180 top (schematic designator RS485_CNCTR)
"RS485 Transceiver" "MAX3485EESA+" FP-S8-5-MFG 66.04,105.816 r90 top
RSIM "0k" FP-CRG0402-IPC_C 41.478,77.064 r180 bottom
SIM_card "693010020611" 693010020611 -1212.197,-1197.199 r180 top (schematic designator SIM_CARD)
SPI_FLASH "W25Q64JVSSIQ_FLASH_SPI" SOIC127P790X216-8N 57.772,96.584 r270 top
SW1 "PTS810SJM250SMTRLFS" FP-PTS810SJM250SMTRLFS-MFG 33.96,89.484 r90 top
SW2 "PTS810SJM250SMTRLFS" FP-PTS810SJM250SMTRLFS-MFG 40.437,89.484 r90 top
U1_Ethernet "W5500" WIZ-W5500-LQFP-48_M 110.769,86.868 r180 top
U1_GPIO "TCA9534PWR" FP-PW0016A-IPC_B 127.686,73.304 r180 top
U1_I2C "ADS7128IRTER" FP-RTE0016C-IPC_B 102.826,105.719 r90 top
U1_PWR "TPS62132RGTR" RGT0016C_V 47.777,112.573 r0 top
U1_SPI "SN65HVD230MDREP" D0008A_L 82.931,107.721 r90 top
UART_BRIDGE "CP2102-GMR" SLAB-QFN-28-3125x3125TP_M 43.612,106.926 r270 top
USB-C "12401899E412A" FP-12401899E412A-MFG 40.31,119.202 r180 top
Y1_Ethernet "25 MHz" WE-XTAL_CFPX-180 97.13,91.516 r270 bottom

## Footprints (in the part's own frame and the unit in brackets; to place one, negate y for a bottom-side part, rotate by r counter-clockwise, add the part's x,y. Pads: shape width x height; smd on the part's side, far side on the other; paste and mask are expansions set on the pad)
691322310002 [mm] "Horizontal PCB Header, pitch 3.81mm, 02p"
  rrect50% 2.1x2.1 hole 1.4: 1(-1.905,3.4)
  round 2.1 hole 1.4: 2(1.905,3.4)
  silkscreen extent -4.4,-4.6 4.41,4.6, body extent -4.4,-4.6 4.41,4.6, height 7.25
691322310003 [mm] "Horizontal PCB Header, pitch 3.81mm, 03p"
  rrect50% 2.1x2.1 hole 1.4: 1(-3.81,3.4)
  round 2.1 hole 1.4: 2(0,3.4) 3(3.81,3.4)
  silkscreen extent -6.31,-4.6 6.31,4.6, body extent -6.31,-4.6 6.31,4.6, height 7.25
691322310006 [mm] "Horizontal PCB Header, pitch 3.81mm, 06p"
  rrect50% 2.1x2.1 hole 1.4: 1(-9.525,3.4)
  round 2.1 hole 1.4: 2(-5.715,3.4) 3(-1.905,3.4) 4(1.905,3.4) 5(5.715,3.4) 6(9.525,3.4)
  silkscreen extent -12.02,-4.6 12.03,4.6, body extent -12.02,-4.6 12.02,4.6, height 7.25
693010020611 [mm] "SIM CARD CONNECTOR HEADER SHIELD ED 6PINS"
  rect 1x1.5 smd: 1(-1273.9,-1265.05) 2(-1271.36,-1265.05) 3(-1268.82,-1265.05) 5(-1273.9,-1277.65) 6(-1271.36,-1277.65) 7(-1268.82,-1277.65)
  rect 1.5x1.6 smd: Shell(-1277.44,-1272.15) Shell(-1277.44,-1269.45) Shell(-1262.54,-1272.15) Shell(-1262.54,-1269.45)
  Top Layer keep-out region: -1273.4,-1275.149 -1274.4,-1275.149 -1274.4,-1276.349 -1273.4,-1276.349
  Top Layer keep-out region: -1270.86,-1275.149 -1271.86,-1275.149 -1271.86,-1276.349 -1270.86,-1276.349
  Top Layer keep-out region: -1268.32,-1275.149 -1269.32,-1275.149 -1269.32,-1276.349 -1268.32,-1276.349
  Top Layer keep-out region: -1274.4,-1267.549 -1273.4,-1267.549 -1273.4,-1266.349 -1274.4,-1266.349
  Top Layer keep-out region: -1271.86,-1267.549 -1270.86,-1267.549 -1270.86,-1266.349 -1271.86,-1266.349
  Top Layer keep-out region: -1269.32,-1267.549 -1268.32,-1267.549 -1268.32,-1266.349 -1269.32,-1266.349
  silkscreen extent -1278.2,-1278.15 -1261.78,-1261.85, body extent -1278.2,-1278.15 -1261.8,-1261.85, height 1.83
693072010801 [mm] "Micro SD Card Connector Hinge - 8 Pins"
  rect 0.8x1.5 smd: 1(3.2,-2.7) 2(2.1,-2.7) 3(1,-2.7) 4(-0.1,-2.7) 5(-1.2,-2.7) 6(-2.3,-2.7) 7(-3.4,-2.7) 8(-4.5,-2.7)
  rect 1.45x2 smd: Shell(-6.875,-5.3) Shell(-6.875,3) Shell(6.875,-5.3) Shell(6.875,3)
  silkscreen extent -6.8,-6.85 6.8,6.85, body extent -7.25,-6.85 7.25,6.85, height 1.79
CAPC0402(1005)60_L [mm] "Chip Capacitor, Body 1.0x0.5mm, Height 0.6mm, IPC High Density"
  rrect25% 0.5x0.55 smd: 1(-0.45,0) 2(0.45,0)
  silkscreen extent 0,-0.2 0,0.2, body extent -0.5,-0.25 0.5,0.25, height 0.6
CAPC0603(1608)100_L [mm] "Chip Capacitor, Body 1.6x0.8mm, Height 1.0mm, IPC High Density"
  rrect25% 0.66x0.76 smd: 1(-0.7,0) 2(0.7,0)
  silkscreen extent 0,-0.3 0,0.3, body extent -0.8,-0.4 0.8,0.4, height 0.95
CAPC0603X33X15NL03T05 [mm] "Chip Capacitor, 2-Leads, Body 0.60x0.30mm, IPC Medium Density"
  rect 0.46x0.42 smd: 1(-0.33,0) 2(0.33,0)
  body extent -0.31,-0.17 0.32,0.16, height 0.33
CAPC0805(2012)145_L [mm] "Chip Capacitor, Body 2.0x1.2mm, Height 1.45mm, IPC High Density"
  rrect25% 0.76x1.3 smd: 1(-0.9,0) 2(0.89,0)
  silkscreen extent -0.3,-0.55 0.3,0.55, body extent -1,-0.6 1,0.6, height 1.45
CAPC1608X90X35LL10T15 [mm] "Chip Capacitor, 2-Leads, Body 1.7x0.9mm, IPC High Density"
  rect 0.75x0.85 smd: 1(-0.625,0) 2(0.625,0)
  body extent -0.85,-0.45 0.85,0.45, height 0.9
CAPC1608X90X35ML15T15 [mm] "Chip Capacitor, 2-Leads, Body 1.75x0.95mm, IPC Low Density"
  rect 1x1.1 smd: 1(-0.725,0) 2(0.725,0)
  body extent -0.87,-0.48 0.87,0.48, height 0.9
CAPC1608X90X40NL10T20 [mm] "Chip Capacitor, 2-Leads, Body 1.70x0.90mm, IPC Medium Density"
  rect 0.95x0.95 smd: 1(-0.625,0) 2(0.625,0)
  body extent -0.85,-0.45 0.85,0.45, height 0.9
CAPC2013X135X45NL10T25 [mm] "Chip Capacitor, 2-Leads, Body 2.10x1.35mm, IPC Medium Density"
  rect 1.2x1.4 smd: 1(-0.85,0) 2(0.85,0)
  body extent -1.05,-0.67 1.05,0.67, height 1.35
CAPC2013X140X50NL20T25 [mm] "Chip Capacitor, 2-Leads, Body 2.00x1.25mm, IPC Medium Density"
  rect 1.3x1.45 smd: 1(-0.8,0) 2(0.8,0)
  body extent -1.1,-0.72 1.1,0.72, height 1.4
CONN_679105700_MOL [mil]
  rect 26x83 smd: 1(-464.57,-161.2) 2(-448.82,161.63) 3(-433.07,-161.2) 4(-417.32,161.63) 5(-401.57,-161.2) 6(-385.83,161.63) 7(-370.08,-161.2) 8(-354.33,161.63) 9(-338.58,-161.2) 10(-322.83,161.63) 11(-307.09,-161.2) 12(-291.34,161.63) 13(-275.59,-161.2) 14(-259.84,161.63) 15(-244.09,-161.2) 16(-228.35,161.63) 17(-86.61,-161.2) 18(-70.87,161.63) 19(-55.12,-161.2) 20(-39.37,161.63) 21(-23.62,-161.2) 22(-7.87,161.63) 23(7.87,-161.2) 24(23.62,161.63) 25(39.37,-161.2) 26(55.12,161.63) 27(70.87,-161.2) 28(86.61,161.63) 29(102.36,-161.2) 30(118.11,161.63) 31(133.86,-161.2) 32(149.61,161.63) 33(165.35,-161.2) 34(181.1,161.63) 35(196.85,-161.2) 36(212.6,161.63) 37(228.35,-161.2) 38(244.09,161.63) 39(259.84,-161.2) 40(275.59,161.63) 41(291.34,-161.2) 42(307.09,161.63) 43(322.83,-161.2) 44(338.58,161.63) 45(354.33,-161.2) 46(370.08,161.63) 47(385.83,-161.2) 48(401.57,161.63) 49(417.32,-161.2) 50(433.07,161.63) 51(448.82,-161.2) 52(464.57,161.63)
  rect 91x126 smd: 53(-576.77,-137.58) 54(576.77,-137.58)
  round 65 hole 65 unplated: ""(-492,0)
  round 45 hole 45 unplated: ""(492,0)
  silkscreen extent -680,-206 596,206
D0008A_L [mm] "SOIC, 8-Leads, Body 5x4mm, Pitch 1.27mm, IPC High Density"
  rrect18% 1.25x0.55 smd: 1(-2.625,1.905) 2(-2.625,0.635) 3(-2.625,-0.635) 4(-2.625,-1.905) 5(2.625,-1.905) 6(2.625,-0.635) 7(2.625,0.635) 8(2.625,1.905)
  silkscreen extent -2.75,-2.5 1.6,2.85, body extent -3,-2.45 3,2.45, height 1.63
FP-2920L-MFG [mm]
  rect 2x5.3 smd paste+0 mask+0: 1(-3.3,0) 2(3.3,0)
  silkscreen extent -1.92,-2.72 1.92,2.72, body extent -3.71,-2.55 3.65,2.57, height 1.25
FP-2337019-1-MFG [mm]
  rect 1x1.05 smd paste+0 mask+0: 1(0,-1.525)
  rect 1.05x2.2 smd paste+0 mask+0: 2(-1.475,0) 3(1.475,0)
  silkscreen extent -1.63,-1.63 1.63,-1.48, body extent -2.1,-2.15 2.1,1.73, height 0.25
FP-12401899E412A-MFG [mm]
  rrect100% 0.5x1.1 hole 1.1 slot 0.5 at 0 deg paste-2539.97 mask+0: 1(-4.49,2.425) 2(4.49,2.425)
  round 0.877 smd paste-1000 mask+0: 1(-4.365,2.6)
  round 0.877 smd far side paste-1000 mask+0: 1(-4.365,2.6)
  rrect100% 1.2x0.55 hole 1.2 slot 0.55 at 90 deg paste-2539.97 mask+0: 1(-4.14,2.7) 2(4.14,2.7)
  round 0.866 smd paste-1000 mask+0: 2(4.396,2.644)
  round 0.866 smd far side paste-1000 mask+0: 2(4.396,2.644)
  rrect100% 0.8x1.4 hole 1.1 slot 0.5 at 0 deg paste-2539.97 mask+0: 3(-4.49,0.025) 4(4.49,0.025)
  rect 0.3x0.7 smd paste+0 mask+0: A1(-2.75,4.585) A2(-2.25,4.585) A3(-1.75,4.585) A4(-1.25,4.585) A5(-0.75,4.585) A6(-0.25,4.585) A7(0.25,4.585) A8(0.75,4.585) A9(1.25,4.585) A10(1.75,4.585) A11(2.25,4.585) A12(2.75,4.585) B1(2.5,2.885) B2(2,2.885) B3(1.5,2.885) B4(1,2.885) B5(0.5,2.885) B6(0,2.885) B7(-0.5,2.885) B8(-1,2.885) B9(-1.5,2.885) B10(-2,2.885) B11(-2.5,2.885) B12(-3,2.885)
  round 0.6 hole 0.6 unplated paste-2539.97 mask+0: ""(-3.6,3.925)
  rrect100% 0.95x0.6 hole 0.95 slot 0.6 at 90 deg unplated paste-2539.97 mask+0: ""(3.6,3.925)
  Top Layer region: 4.89,2.125 4.836,1.925 4.69,1.779 4.49,1.725 4.49,1.725 4.337,1.755 4.207,1.842 4.12,1.972 4.09,2.125 4.09,2.125 4.072,2.197 4.021,2.252 3.95,2.275 3.95,2.275 3.59,2.275 3.513,2.29 3.449,2.334 3.405,2.398 3.39,2.475 3.39,2.475 3.39,2.925 3.417,3.025 3.49,3.098 3.59,3.125 3.59,3.125 4.69,3.125 4.79,3.098 4.863,3.025 4.89,2.925 4.89,2.925 4.89,2.925
  Top Layer region: -4.89,2.425 -4.89,2.125 -4.836,1.925 -4.69,1.779 -4.49,1.725 -4.49,1.725 -4.337,1.755 -4.207,1.842 -4.12,1.972 -4.09,2.125 -4.09,2.125 -4.072,2.197 -4.021,2.252 -3.95,2.275 -3.95,2.275 -3.59,2.275 -3.513,2.29 -3.449,2.334 -3.405,2.398 -3.39,2.475 -3.39,2.475 -3.39,2.925 -3.417,3.025 -3.49,3.098 -3.59,3.125 -3.59,3.125 -4.69,3.125 -4.79,3.098 -4.863,3.025 -4.89,2.925 -4.89,2.925
  Bottom Layer region: 4.89,2.125 4.836,1.925 4.69,1.779 4.49,1.725 4.49,1.725 4.337,1.755 4.207,1.842 4.12,1.972 4.09,2.125 4.09,2.125 4.072,2.197 4.021,2.252 3.95,2.275 3.95,2.275 3.59,2.275 3.513,2.29 3.449,2.334 3.405,2.398 3.39,2.475 3.39,2.475 3.39,2.925 3.417,3.025 3.49,3.098 3.59,3.125 3.59,3.125 4.69,3.125 4.79,3.098 4.863,3.025 4.89,2.925 4.89,2.925 4.89,2.925
  Bottom Layer region: -4.89,2.125 -4.836,1.925 -4.69,1.779 -4.49,1.725 -4.49,1.725 -4.337,1.755 -4.207,1.842 -4.12,1.972 -4.09,2.125 -4.09,2.125 -4.072,2.197 -4.021,2.252 -3.95,2.275 -3.95,2.275 -3.59,2.275 -3.513,2.29 -3.449,2.334 -3.405,2.398 -3.39,2.475 -3.39,2.475 -3.39,2.925 -3.417,3.025 -3.49,3.098 -3.59,3.125 -3.59,3.125 -4.69,3.125 -4.79,3.098 -4.863,3.025 -4.89,2.925 -4.89,2.925 -4.89,2.925
  Keep-Out Layer region: -3.741,-1.075 3.739,-1.075 3.739,2.185 -3.741,2.185
  silkscreen extent -4.66,3.5 4.66,5.65, body extent -4.99,-4.95 4.99,5.03, height 0.25
FP-ABM8AIG-MFG [mm]
  rect 1.4x1.2 smd paste+0 mask+0: 1(-1.1,-0.8) 2(1.1,-0.8) 3(1.1,0.8) 4(-1.1,0.8)
  silkscreen extent -2.48,-1.8 1.65,1.8, body extent -1.9,-1.5 1.9,1.5, height 0.25
FP-AC0603-IPC_A [mm]
  rect 1.059x1.012 smd paste+0 mask+0: 1(-0.877,0) 2(0.877,0)
  silkscreen extent -1.41,-0.91 1.41,0.91, body extent -0.8,-0.4 0.8,0.4, height 0.55
FP-AC0805-0_85-IPC_A [mm]
  rect 1.505x1.556 smd paste+0 mask+0: 1(-0.901,0) 2(0.901,0)
  silkscreen extent -1.65,-1.18 1.65,1.18, body extent -2.15,-1.28 2.15,1.28, height 0.25
FP-APTD1608ZGC-MFG [mm]
  rect 0.8x0.8 smd paste+0 mask+0: 1(-0.825,0) 2(0.825,0)
  silkscreen extent -2.02,-0.48 0.05,0.48, body extent -0.8,-0.4 0.8,0.4, height 1.1
FP-C1608-080-0_1-IPC_B [mm]
  rect 1.131x0.912 smd paste+0 mask+0: 1(-0.641,0) 2(0.641,0)
  silkscreen extent -1.21,-0.86 1.21,0.86, body extent -1.46,-0.71 1.46,0.71, height 0.25
FP-CC0201-BA-MFG [mm]
  rect 0.28x0.3 smd paste+0 mask+0: 1(-0.265,0) 2(0.265,0)
  silkscreen extent -0.32,-0.53 0.32,0.53, body extent -0.3,-0.15 0.3,0.15, height 0.33
FP-CRCW1206-e3-IPC_B [mm]
  rect 1.156x1.758 smd paste+0 mask+0: 1(-1.426,0) 2(1.426,0)
  silkscreen extent -0.47,-0.8 0.47,0.8, body extent -2.25,-1.13 2.25,1.13, height 0.25
FP-CRG0402-IPC_C [mm]
  rect 0.56x0.472 smd paste+0 mask+0: 1(-0.376,0) 2(0.376,0)
  silkscreen extent -0.66,-0.67 0.66,0.67, body extent -0.76,-0.38 0.76,0.38, height 0.25
FP-CRGCQ1206-IPC_C [mm]
  rect 0.956x1.61 smd paste+0 mask+0: 1(-1.301,0) 2(1.301,0)
  silkscreen extent -0.45,-0.77 0.45,0.77, body extent -1.88,-0.95 1.88,0.95, height 0.25
FP-GCG155-0_1-IPC_A [mm]
  rect 0.76x0.672 smd paste+0 mask+0: 1(-0.476,0) 2(0.476,0)
  silkscreen extent -0.86,-0.74 0.86,0.74, body extent -1.06,-0.54 1.06,0.54, height 0.25
FP-GCJ31C-0_3-IPC_C [mm]
  rect 1.453x1.804 smd paste+0 mask+0: 1(-1.175,0) 2(1.175,0)
  silkscreen extent 0,-0.95 0,0.95, body extent -1.6,-0.8 1.6,0.8, height 1.9
FP-GCM155-0_05-IPC_A [mm]
  rect 0.715x0.672 smd paste+0 mask+0: 1(-0.479,0) 2(0.479,0)
  silkscreen extent -0.84,-0.74 0.84,0.74, body extent -0.5,-0.25 0.5,0.25, height 0.55
FP-GQM219-0_15-MFG [mm]
  rect 0.65x0.95 smd paste+0 mask+0: 1(-0.875,0) 2(0.875,0)
  silkscreen extent -0.18,-0.7 0.18,0.7, body extent -1.3,-0.8 1.3,0.8, height 0.25
FP-GRM21B-0_2-e0_2_0_7-MFG [mm]
  rect 0.7x1.3 smd paste+0 mask+0: 1(-0.95,0) 2(0.95,0)
  silkscreen extent -0.23,-0.72 0.23,0.72, body extent -1.4,-0.82 1.4,0.82, height 0.25
FP-GRM033-0_03-MFG [mm]
  rect 0.25x0.3 smd paste+0 mask+0: 1(-0.238,0) 2(0.238,0)
  silkscreen extent -0.32,-0.54 0.32,0.54, body extent -0.46,-0.27 0.46,0.27, height 0.25
FP-GRM155-0_05-MFG [mm]
  rect 0.4x0.5 smd paste+0 mask+0: 1(-0.4,0) 2(0.4,0)
  silkscreen extent -0.5,-0.65 0.5,0.65, body extent -0.5,-0.25 0.5,0.25, height 0.55
FP-GRM188-0_1-e0_2_0_55-IPC_A [mm]
  rect 1.208x1.012 smd paste+0 mask+0: 1(-0.802,0) 2(0.802,0)
  silkscreen extent -1.41,-0.91 1.41,0.91, body extent -1.91,-1.01 1.91,1.01, height 0.25
FP-GRM188-0_15-IPC_C [mm]
  rect 0.856x0.858 smd paste+0 mask+0: 1(-0.601,0) 2(0.601,0)
  silkscreen extent -1.03,-0.87 1.03,0.87
FP-LQP03TG_02-IPC_A [mm]
  rect 0.554x0.463 smd paste+0 mask+0: 1(-0.354,0) 2(0.354,0)
  silkscreen extent -1.37,-0.63 0.63,0.63, body extent -0.83,-0.43 0.83,0.43, height 0.25
FP-LQW15AN_00-W0_5-0_1-MFG [mm]
  rect 0.35x0.65 smd paste+0 mask+0: 1(-0.425,0) 2(0.425,0)
  silkscreen extent -0.55,-0.71 0.55,0.7, body extent -0.7,-0.43 0.7,0.43, height 0.25
FP-PTS810SJM250SMTRLFS-MFG [mm]
  rect 1.05x0.65 smd paste+0 mask+0: 1(-2.075,1.075) 2(2.075,1.075) 3(-2.075,-1.075) 4(2.075,-1.075)
  silkscreen extent -3.27,-1.6 2.1,1.6, body extent -2.7,-1.7 2.7,1.7, height 0.25
FP-PW0016A-IPC_B [mm]
  rect 1.655x0.381 smd paste+0 mask+0: 1(-2.825,2.275)
  rrect100% 1.655x0.381 smd paste+0 mask+0: 2(-2.825,1.625) 3(-2.825,0.975) 4(-2.825,0.325) 5(-2.825,-0.325) 6(-2.825,-0.975) 7(-2.825,-1.625) 8(-2.825,-2.275) 9(2.825,-2.275) 10(2.825,-1.625) 11(2.825,-0.975) 12(2.825,-0.325) 13(2.825,0.325) 14(2.825,0.975) 15(2.825,1.625) 16(2.825,2.275)
  silkscreen extent -4.63,-2.5 1.5,2.5, body extent -3.9,-2.75 3.9,2.75, height 0.25
FP-RP732B-MFG [mm]
  rect 1.15x1.7 smd paste+0 mask+0: 1(-1.575,0) 2(1.575,0)
  silkscreen extent -0.63,-0.85 0.63,0.85, body extent -1.53,-0.77 1.53,0.77, height 0.65
FP-RTE0016C-IPC_B [mm]
  rect 0.831x0.239 smd paste+0 mask+0: 1(-1.441,0.75)
  rrect100% 0.831x0.239 smd paste+0 mask+0: 2(-1.441,0.25) 3(-1.441,-0.25) 4(-1.441,-0.75) 9(1.441,-0.75) 10(1.441,-0.25) 11(1.441,0.25) 12(1.441,0.75)
  rrect100% 0.239x0.831 smd paste+0 mask+0: 5(-0.75,-1.441) 6(-0.25,-1.441) 7(0.25,-1.441) 8(0.75,-1.441) 13(0.75,1.441) 14(0.25,1.441) 15(-0.25,1.441) 16(-0.75,1.441)
  rect 1.75x1.75 smd paste-1000 mask+0: 17(0,0)
  silkscreen extent -2.53,-1.5 1.5,1.5, body extent -2.11,-2.11 2.11,2.11, height 0.25
FP-S8-5-MFG [mm]
  rect 1.98x0.53 smd paste+0 mask+0: 1(-2.465,1.905) 2(-2.465,0.635) 3(-2.465,-0.635) 4(-2.465,-1.905) 5(2.465,-1.905) 6(2.465,-0.635) 7(2.465,0.635) 8(2.465,1.905)
  silkscreen extent -4.2,-2.5 1.1,2.5, body extent -3.55,-2.75 3.55,2.75, height 0.25
FP-SOD323-CA-MFG [mm]
  rect 0.6x0.6 smd paste-1000 mask+0: 1(-1.1,0) 2(1.1,0)
  silkscreen extent -0.43,-0.67 0.43,0.67, body extent -1.53,-0.82 1.53,0.82, height 0.25
FP-TFCR0805-IPC_C [mm]
  rect 0.956x1.308 smd paste+0 mask+0: 1(-0.751,0) 2(0.751,0)
  silkscreen extent -1.23,-1.1 1.23,1.1, body extent -1.33,-0.8 1.33,0.8, height 0.25
FP-XFL4020-MFG [mm]
  rect 0.98x3.4 smd paste+0 mask+0: 1(-1.185,0) 2(1.185,0)
  silkscreen extent -2.15,-2.15 2.15,2.15, body extent -2,-2 2,2, height 2.23
IC_ESP32-S3 [mm]
  rect 0.65x0.22 smd mask+0.05: 1(-3.425,2.6) 2(-3.425,2.2) 3(-3.425,1.8) 4(-3.425,1.4) 5(-3.425,1) 6(-3.425,0.6) 7(-3.425,0.2) 8(-3.425,-0.2) 9(-3.425,-0.6) 10(-3.425,-1) 11(-3.425,-1.4) 12(-3.425,-1.8) 13(-3.425,-2.2) 14(-3.425,-2.6) 29(3.425,-2.6) 30(3.425,-2.2) 31(3.425,-1.8) 32(3.425,-1.4) 33(3.425,-1) 34(3.425,-0.6) 35(3.425,-0.2) 36(3.425,0.2) 37(3.425,0.6) 38(3.425,1) 39(3.425,1.4) 40(3.425,1.8) 41(3.425,2.2) 42(3.425,2.6)
  rect 0.22x0.65 smd mask+0.05: 15(-2.6,-3.425) 16(-2.2,-3.425) 17(-1.8,-3.425) 18(-1.4,-3.425) 19(-1,-3.425) 20(-0.6,-3.425) 21(-0.2,-3.425) 22(0.2,-3.425) 23(0.6,-3.425) 24(1,-3.425) 25(1.4,-3.425) 26(1.8,-3.425) 27(2.2,-3.425) 28(2.6,-3.425) 43(2.6,3.425) 44(2.2,3.425) 45(1.8,3.425) 46(1.4,3.425) 47(1,3.425) 48(0.6,3.425) 49(0.2,3.425) 50(-0.2,3.425) 51(-0.6,3.425) 52(-1,3.425) 53(-1.4,3.425) 54(-1.8,3.425) 55(-2.2,3.425) 56(-2.6,3.425)
  rect 4.1x4.1 smd paste-1.55: 57(0,0)
  silkscreen extent -4.55,-3.5 3.5,3.5, body extent -3.5,-3.5 3.5,3.5, height 0.9
INDC0603X28N [mm]
  rect 0.38x0.4 smd: 1(-0.28,0) 2(0.28,0)
  body extent -0.3,-0.13 0.3,0.1, height 0.25
MURA-0603_H_0.9_M [mm] "SMD, 2-Leads, Body 1.7x0.9mm, IPC Low Density"
  rect 1x1.05 smd: 1(-0.7,0) 2(0.7,0)
  body extent -0.85,-0.45 0.85,0.45, height 0.9
PULS-J00XXD21XNL-B-12 [mm] "RJ45, 12-Leads, Body 16.26x21.59mm, Pitch 1.27mm"
  rect 1.4x1.4 hole 0.89: 1(4.445,-6.35)
  round 1.4 hole 0.89: 2(3.175,-8.89) 3(1.905,-6.35) 4(0.635,-8.89) 5(-0.635,-6.35) 6(-1.905,-8.89) 7(-3.175,-6.35) 8(-4.445,-8.89)
  round 1.55 hole 1.02: 9(6.325,4.9) 10(3.785,3.38) 11(-3.785,4.9) 12(-6.325,3.38)
  round 0 hole 3.2 unplated: MH1(5.715,0) MH2(-5.715,0)
  round 2.1 hole 1.6: S1(7.875,-3.05) S2(-7.875,-3.05)
  silkscreen extent -8.13,-10.8 8.13,10.79, body extent -8.13,-10.79 8.13,10.8, height 17.13
RESC0201(0603)_M [mm] "Chip Resistor, Body 0.6x0.3mm, IPC Low Density"
  rect 0.55x0.55 smd: 1(-0.4,0) 2(0.4,0)
  body extent -0.31,-0.16 0.31,0.16, height 0.3
RESC0402(1005)_L [mm] "Chip Resistor, Body 1.0x0.5mm, IPC High Density"
  rrect25% 0.5x0.55 smd: 1(-0.45,0) 2(0.45,0)
  silkscreen extent 0,-0.2 0,0.2, body extent -0.5,-0.25 0.5,0.25, height 0.3
RESC0603(1608)_L [mm] "Chip Resistor, Body 1.6x0.8mm, IPC High Density"
  rrect25% 0.66x0.76 smd: 1(-0.7,0) 2(0.7,0)
  silkscreen extent 0,-0.3 0,0.3, body extent -0.8,-0.4 0.8,0.4, height 0.45
RESC0805(2012)_L [mm] "Chip Resistor, Body 2.0x1.3mm, IPC High Density"
  rrect25% 0.76x1.3 smd: 1(-0.9,0) 2(0.89,0)
  silkscreen extent -0.3,-0.55 0.3,0.55, body extent -1,-0.62 1,0.63, height 0.6
RESC1005X40X25ML05T05 [mm] "Chip Resistor, 2-Leads, Body 1.05x0.55mm, IPC Low Density"
  rect 0.65x0.65 smd: 1(-0.5,0) 2(0.5,0)
  body extent -0.53,-0.28 0.53,0.28, height 0.4
RESC1608X55X25LL10T15 [mm] "Chip Resistor, 2-Leads, Body 1.60x0.80mm, IPC High Density"
  rect 0.6x0.8 smd: 1(-0.65,0) 2(0.65,0)
  body extent -0.85,-0.45 0.85,0.45, height 0.55
RESC1608X55X25ML10T15 [mm] "Chip Resistor, 2-Leads, Body 1.70x0.90mm, IPC Low Density"
  rect 0.8x1 smd: 1(-0.75,0) 2(0.75,0)
  body extent -0.85,-0.45 0.85,0.45, height 0.55
RESC1608X55X25NL10T15 [mm] "Chip Resistor, 2-Leads, Body 1.70x0.90mm, IPC Medium Density"
  rect 0.7x0.9 smd: 1(-0.7,0) 2(0.7,0)
  body extent -0.85,-0.45 0.85,0.45, height 0.55
RESC3116X65X40NL10T20 [mm] "Chip Resistor, 2-Leads, Body 3.10x1.60mm, IPC Medium Density"
  rect 1.05x1.7 smd: 1(-1.425,0) 2(1.425,0)
  silkscreen extent -0.5,-0.75 0.5,0.75, body extent -1.6,-0.85 1.6,0.85, height 0.65
RGT0016C_V [mm] "QFN, 16-Leads, Body 3x3mm, Pitch 0.5mm, Thermal Pad 1.65x1.65mm"
  rrect40% 0.6x0.25 smd: 1(-1.4,0.75) 2(-1.4,0.25) 3(-1.4,-0.25) 4(-1.4,-0.75) 9(1.4,-0.75) 10(1.4,-0.25) 11(1.4,0.25) 12(1.4,0.75)
  rrect40% 0.25x0.6 smd: 5(-0.75,-1.4) 6(-0.25,-1.4) 7(0.25,-1.4) 8(0.75,-1.4) 13(0.75,1.4) 14(0.25,1.4) 15(-0.25,1.4) 16(-0.75,1.4)
  rrect6% 1.55x1.55 on Top Paste: 17(0,0)
  rrect6% 1.7x1.7 smd paste-0.85: 17(0,0)
  silkscreen extent -2.35,-1.57 1.57,1.58, body extent -1.5,-1.5 1.5,1.5, height 1
SLAB-QFN-28-3125x3125TP_M [mm] "QFN, 28-Leads, Body 5x5mm, Pitch 0.5mm, Thermal Pad 3.13x3.13mm, IPC Low Density"
  oval 0.95x0.2 smd: 1(-2.475,1.5) 2(-2.475,1) 3(-2.475,0.5) 4(-2.475,0) 5(-2.475,-0.5) 6(-2.475,-1) 7(-2.475,-1.5) 15(2.475,-1.5) 16(2.475,-1) 17(2.475,-0.5) 18(2.475,0) 19(2.475,0.5) 20(2.475,1) 21(2.475,1.5)
  oval 0.2x0.95 smd: 8(-1.5,-2.475) 9(-1,-2.475) 10(-0.5,-2.475) 11(0,-2.475) 12(0.5,-2.475) 13(1,-2.475) 14(1.5,-2.475) 22(1.5,2.475) 23(1,2.475) 24(0.5,2.475) 25(0,2.475) 26(-0.5,2.475) 27(-1,2.475) 28(-1.5,2.475)
  rect 3.13x3.13 smd: 29(0,0)
  silkscreen extent -3.42,-2.65 2.65,2.65, body extent -2.5,-2.5 2.5,2.5, height 1
SOIC127P790X216-8N [mm]
  rrect25% 1.61x0.58 smd: 1(-3.605,1.905) 2(-3.605,0.635) 3(-3.605,-0.635) 4(-3.605,-1.905) 5(3.605,-1.905) 6(3.605,-0.635) 7(3.605,0.635) 8(3.605,1.905)
  silkscreen extent -5.31,-2.69 2.69,2.69, body extent -3.95,-2.64 3.95,2.64, height 2.16
SOP8L_APS1604M-3SQR-SN_APY [mil]
  rect 53.5x22 smd paste+0 mask+0: 1(-105.25,75) 2(-105.25,25) 3(-105.25,-25) 4(-105.25,-75) 5(105.25,-75) 6(105.25,-25) 7(105.25,25) 8(105.25,75)
  silkscreen extent -84,-104 84,104, body extent -118,-99 118,99, height 69
WE-TVSP_DO-214AA_Unidirectional [mm] "Power TVS Diode, 2-Leads. body 4.32x3.62mm"
  rect 2.3x2.3 smd: 1(-2.25,0) 2(2.25,0)
  silkscreen extent -2.28,-1.97 2.28,1.97, body extent -2.7,-1.81 2.7,1.81, height 2.38
WE-XTAL_CFPX-180 [mm] "Quartz Crystal, size CFPX-180, body 3.4x2.7mm"
  rect 1.4x1.2 smd: 1(-1.1,-0.85) 2(1.1,-0.85) 3(1.1,0.85) 4(-1.1,0.85)
  silkscreen extent -2.42,-0.88 -2.18,-0.63, body extent -1.7,-1.35 1.7,1.35, height 0.8
WIZ-W5500-LQFP-48_M [mm] "LQFP, 48-Leads, Body 7.00x7.00mm, Pitch 0.50mm, IPC Low Density"
  oval 1.65x0.3 smd: 1(-4.325,2.75) 2(-4.325,2.25) 3(-4.325,1.75) 4(-4.325,1.25) 5(-4.325,0.75) 6(-4.325,0.25) 7(-4.325,-0.25) 8(-4.325,-0.75) 9(-4.325,-1.25) 10(-4.325,-1.75) 11(-4.325,-2.25) 12(-4.325,-2.75) 25(4.325,-2.75) 26(4.325,-2.25) 27(4.325,-1.75) 28(4.325,-1.25) 29(4.325,-0.75) 30(4.325,-0.25) 31(4.325,0.25) 32(4.325,0.75) 33(4.325,1.25) 34(4.325,1.75) 35(4.325,2.25) 36(4.325,2.75)
  oval 0.3x1.65 smd: 13(-2.75,-4.325) 14(-2.25,-4.325) 15(-1.75,-4.325) 16(-1.25,-4.325) 17(-0.75,-4.325) 18(-0.25,-4.325) 19(0.25,-4.325) 20(0.75,-4.325) 21(1.25,-4.325) 22(1.75,-4.325) 23(2.25,-4.325) 24(2.75,-4.325) 37(2.75,4.325) 38(2.25,4.325) 39(1.75,4.325) 40(1.25,4.325) 41(0.75,4.325) 42(0.25,4.325) 43(-0.25,4.325) 44(-0.75,4.325) 45(-1.25,4.325) 46(-1.75,4.325) 47(-2.25,4.325) 48(-2.75,4.325)
  silkscreen extent -4.45,-3.1 3.1,3.6, body extent -4.5,-4.5 4.5,4.5, height 1.6

## Part data
ANALOG_CH0_CH3 ANALOG_CH4_CH7 DIGITAL_IN DIGITAL_OUT: library part CMP-002-00076-1, "Wurth Elektronik 3.81mmpitch6pPlug-in terminal blocks socket head, 322series, 300.0 v, welding", Color=Green, Current=10A, Manufacturer Lifecycle Status=ACTIVE, Max Operating Temperature=105°C, Min Operating Temperature=-40°C, Voltage=300V, Contact Material=Brass, Contact Plating=Tin, Gender=Male, Height=9.2mm, Lead Pitch=3.81mm, Length=24.05mm, Lifecycle Status=Production, Mounting Technology="Through Hole", Number of Contacts=6, Number of Levels=1, Number of Positions Per Level=6, Number of Rows=1, Packaging=Box, Pins=6, Pitch=3.81mm, REACH SVHC=No, RoHS=Compliant, Termination=Solder, Width=24.25mm, YEOL="1 = Estimated lifetime > 10 years"
C1 C2: library part CMP-06035-024923-1, "Ceramic Capacitor 28pF ±2% 250VDC C0G 0805 Paper T/R"
C1_Ethernet C2_Ethernet: library part CMP-2000-06334-1, "Chip Capacitor, 18 pF, +/- 5%, 50 V, -55 to 125 degC, 0603 (1608 Metric), RoHS, Tape and Reel", Capacitance=18pF, Manufacturer=Murata, Operating Temperature=-55°C~125°C, Package / Case=0603(1608Metric), Package Description="2-Pin Surface Mount Device, Body 1.6 x 0.8 mm", Package Reference=0603, Ratings=-, Standard Package=4,000, Temperature Coefficient=C0G,NP0, Tolerance=±5%, Voltage - Rated=50V, Applications=GeneralPurpose, Category=Capacitors, Datasheet URL=http://search.murata.co.jp/Ceramy/image/img/A01X/G101/ENG/GRM1885C1H180JA01-01.pdf, Datasheet Version=03/2016, Family=CeramicCapacitors, Features=-, Height - Seated (Max)=-, Lead Spacing=-, Lead Style=-, Manufacturer URL=http://www.murata.com/, Mounting Technology=SurfaceMount, Mounting Type=SurfaceMount,MLCC, Online Catalog=GRMSeries, Other Names=490-1409-2GRM39C0G180J050AD, Packaging=Tape&Reel(TR), Series=GRM, Size / Dimension="0.063\"Lx0.031\"W(1.60mmx0.80mm)", Thickness (Max)="0.035\"(0.90mm)"
C1_GPIO CAVIN: library part CMP-001-00017-6, "Chip Capacitor, 100 nF, +/- 10%, 50 V, 0603 (1608 Metric)", Capacitor Type=Ceramic, Case/Package=0603, Max Operating Temperature=125°C, Min Operating Temperature=-55°C, Tolerance=10%, Voltage Rating=50V, Mounting Technology=SM, Pins=2, RoHS Compliant=True
C1_I2C C2_I2C C3_I2C: library part CMP-001-00084-1, "6.3V 1uF X7R ±10% 0805 Multilayer Ceramic Capacitors MLCC - SMD/SMT ROHS", Case/Package=0805, Dielectric=X7R, Dielectric Material=Ceramic, Max Operating Temperature=125°C, Min Operating Temperature=-55°C, Ratings=AEC-Q200, Tolerance=10%, Voltage Rating=6.3V, China RoHS=Compliant, Country of Origin="Mainland China, Taiwan", Export Control Classification Number (ECCN) Code=EAR99, Height=1.25mm, Introduction Date=2022-09-21, Length=2mm, Lifecycle Status=Production, Material=Ceramic, Mounting Technology="Surface Mount", Number of Terminals=2, REACH SVHC=Yes, RoHS=Compliant, Voltage Rating (DC)=6.3V, Width=1.25mm
C2_CAN C3 C4: library part CMP-001-00067-3, "Chip Capacitor, 100nF +/-20%, 50V, 0402, Thickness 0.6 mm", Case/Package=0402, Max Operating Temperature=85°C, Min Operating Temperature=-55°C, Tolerance=10%, Voltage Rating=50V, Mounting Technology=SMT, Pins=2
C2_GPIO C3_GPIO C4_GPIO C4_I2C C5_GPIO C5_I2C C6_I2C C7_I2C C8_I2C C8_PWRFLTR C9_I2C C10_I2C C11_I2C: library part CMP-001-00069-3, "Chip Capacitor, 10nF +/-20%, 50V, 0402, Thickness 0.6 mm", Case/Package=0402, Max Operating Temperature=85°C, Min Operating Temperature=-55°C, Tolerance=5%, Voltage Rating=50V, Mounting Technology=SMT, Pins=2
C3_Ethernet C4_Ethernet C5_Ethernet C6_Ethernet C7_Ethernet C8_Ethernet C9_Ethernet C11_Ethernet: library part CMP-001-00061-3, "Chip Capacitor, 100nF +/-20%, 10V, 0402, Thickness 0.6 mm", Case/Package=0402, Max Operating Temperature=85°C, Min Operating Temperature=-55°C, Tolerance=20%, Voltage Rating=10V, Mounting Technology=SMT, Pins=2
C5: library part CMP-001-00004-6, "Chip Capacitor, 1 uF, +/- 10%, 16 V, 0603 (1608 Metric)", Capacitor Type=Ceramic, Case/Package=0603, Max Operating Temperature=125°C, Min Operating Temperature=-55°C, Tolerance=10%, Voltage Rating=16V, Mounting Technology=SM, Pins=2, RoHS Compliant=True